# EAGLE board MicroMod_Asset_Tracker-Panel (EAGLE 9.6.2), part 1 of 5
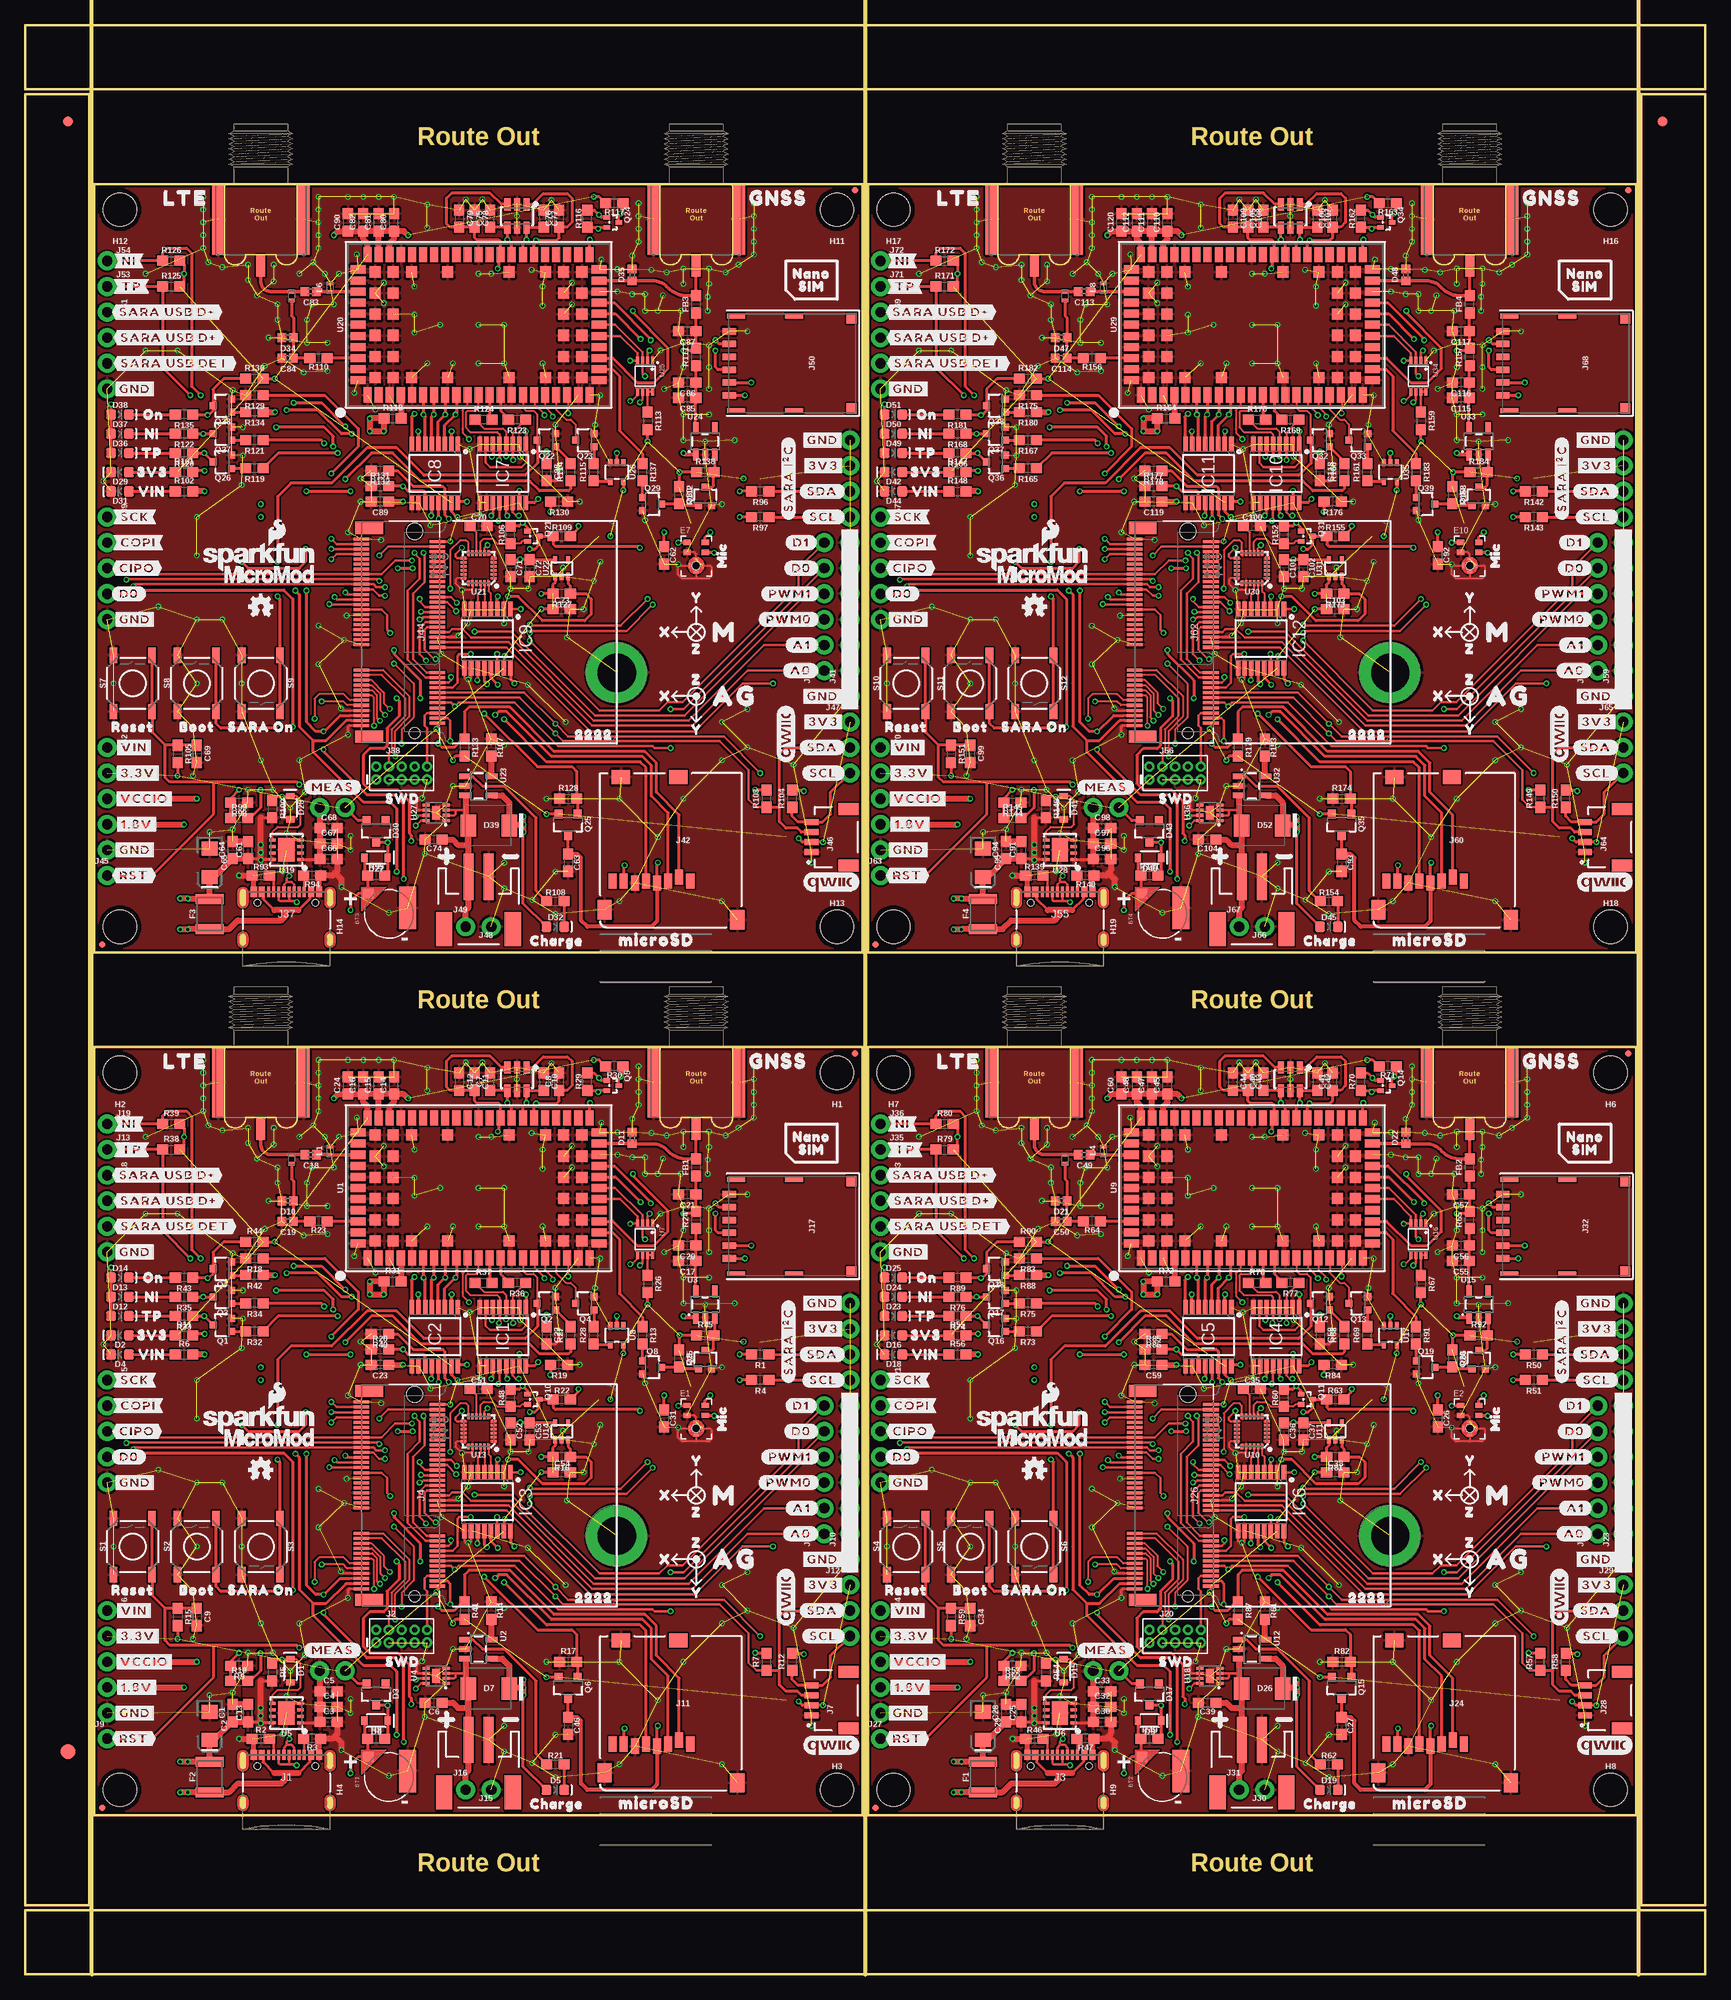
[diagram p0: board, top side]
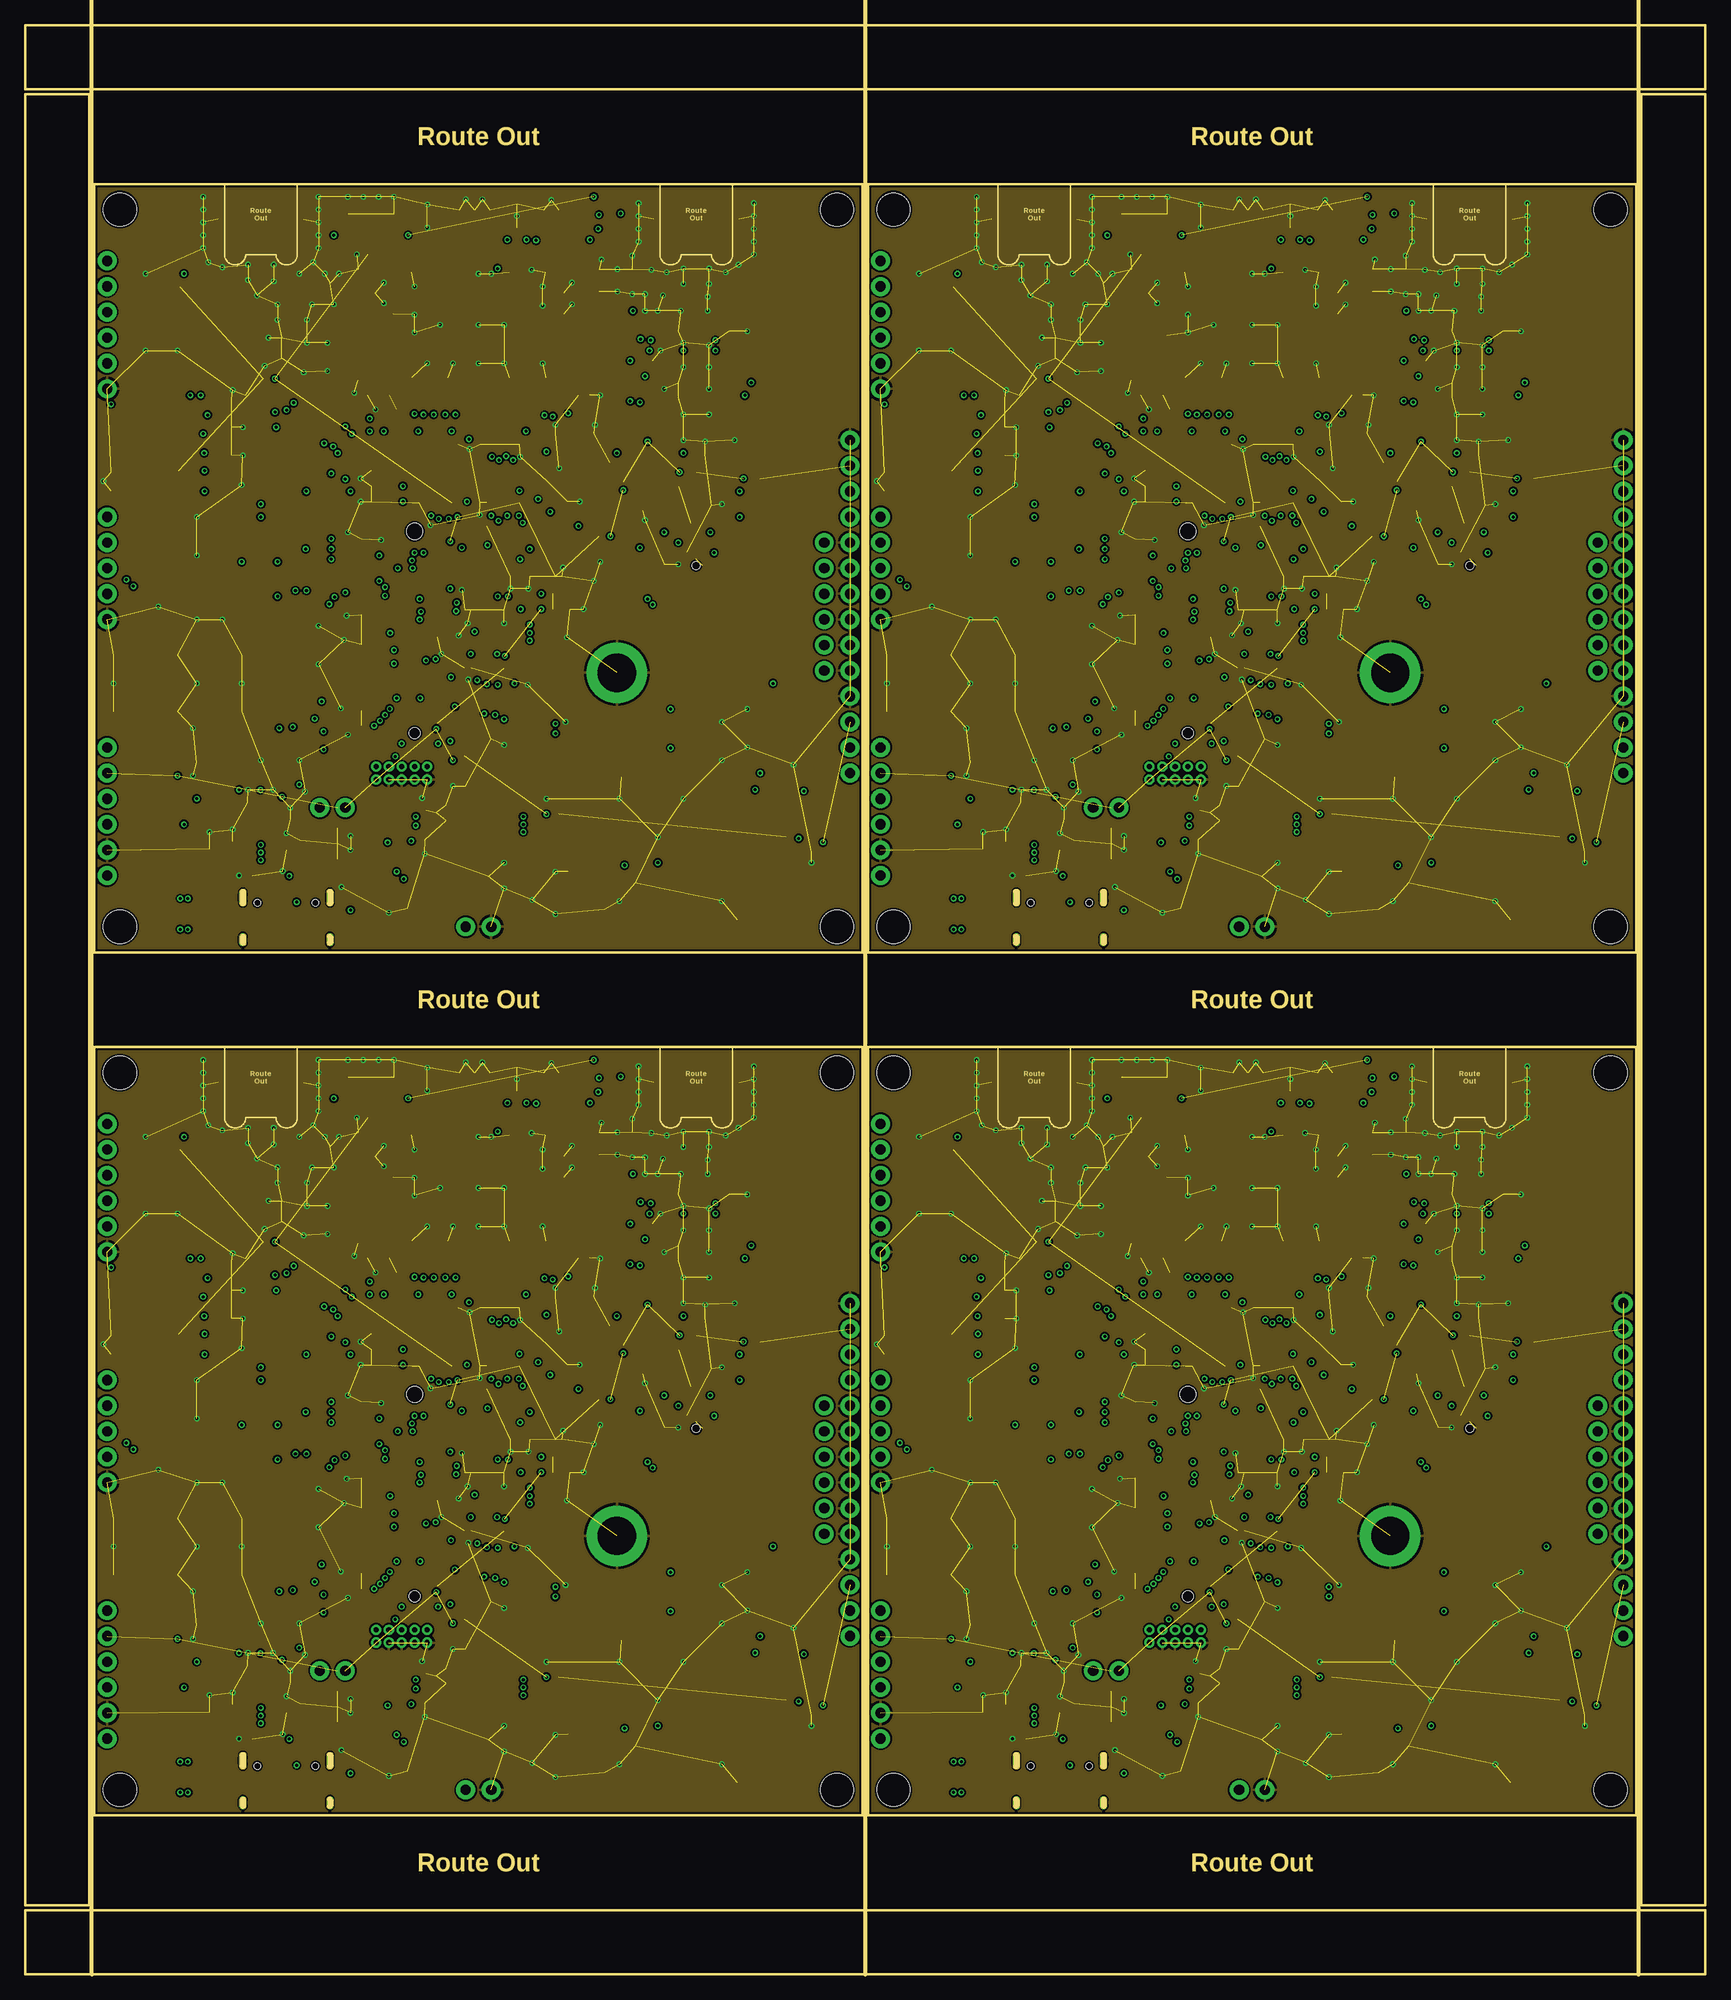
[diagram p1: board, inner layer Route2]
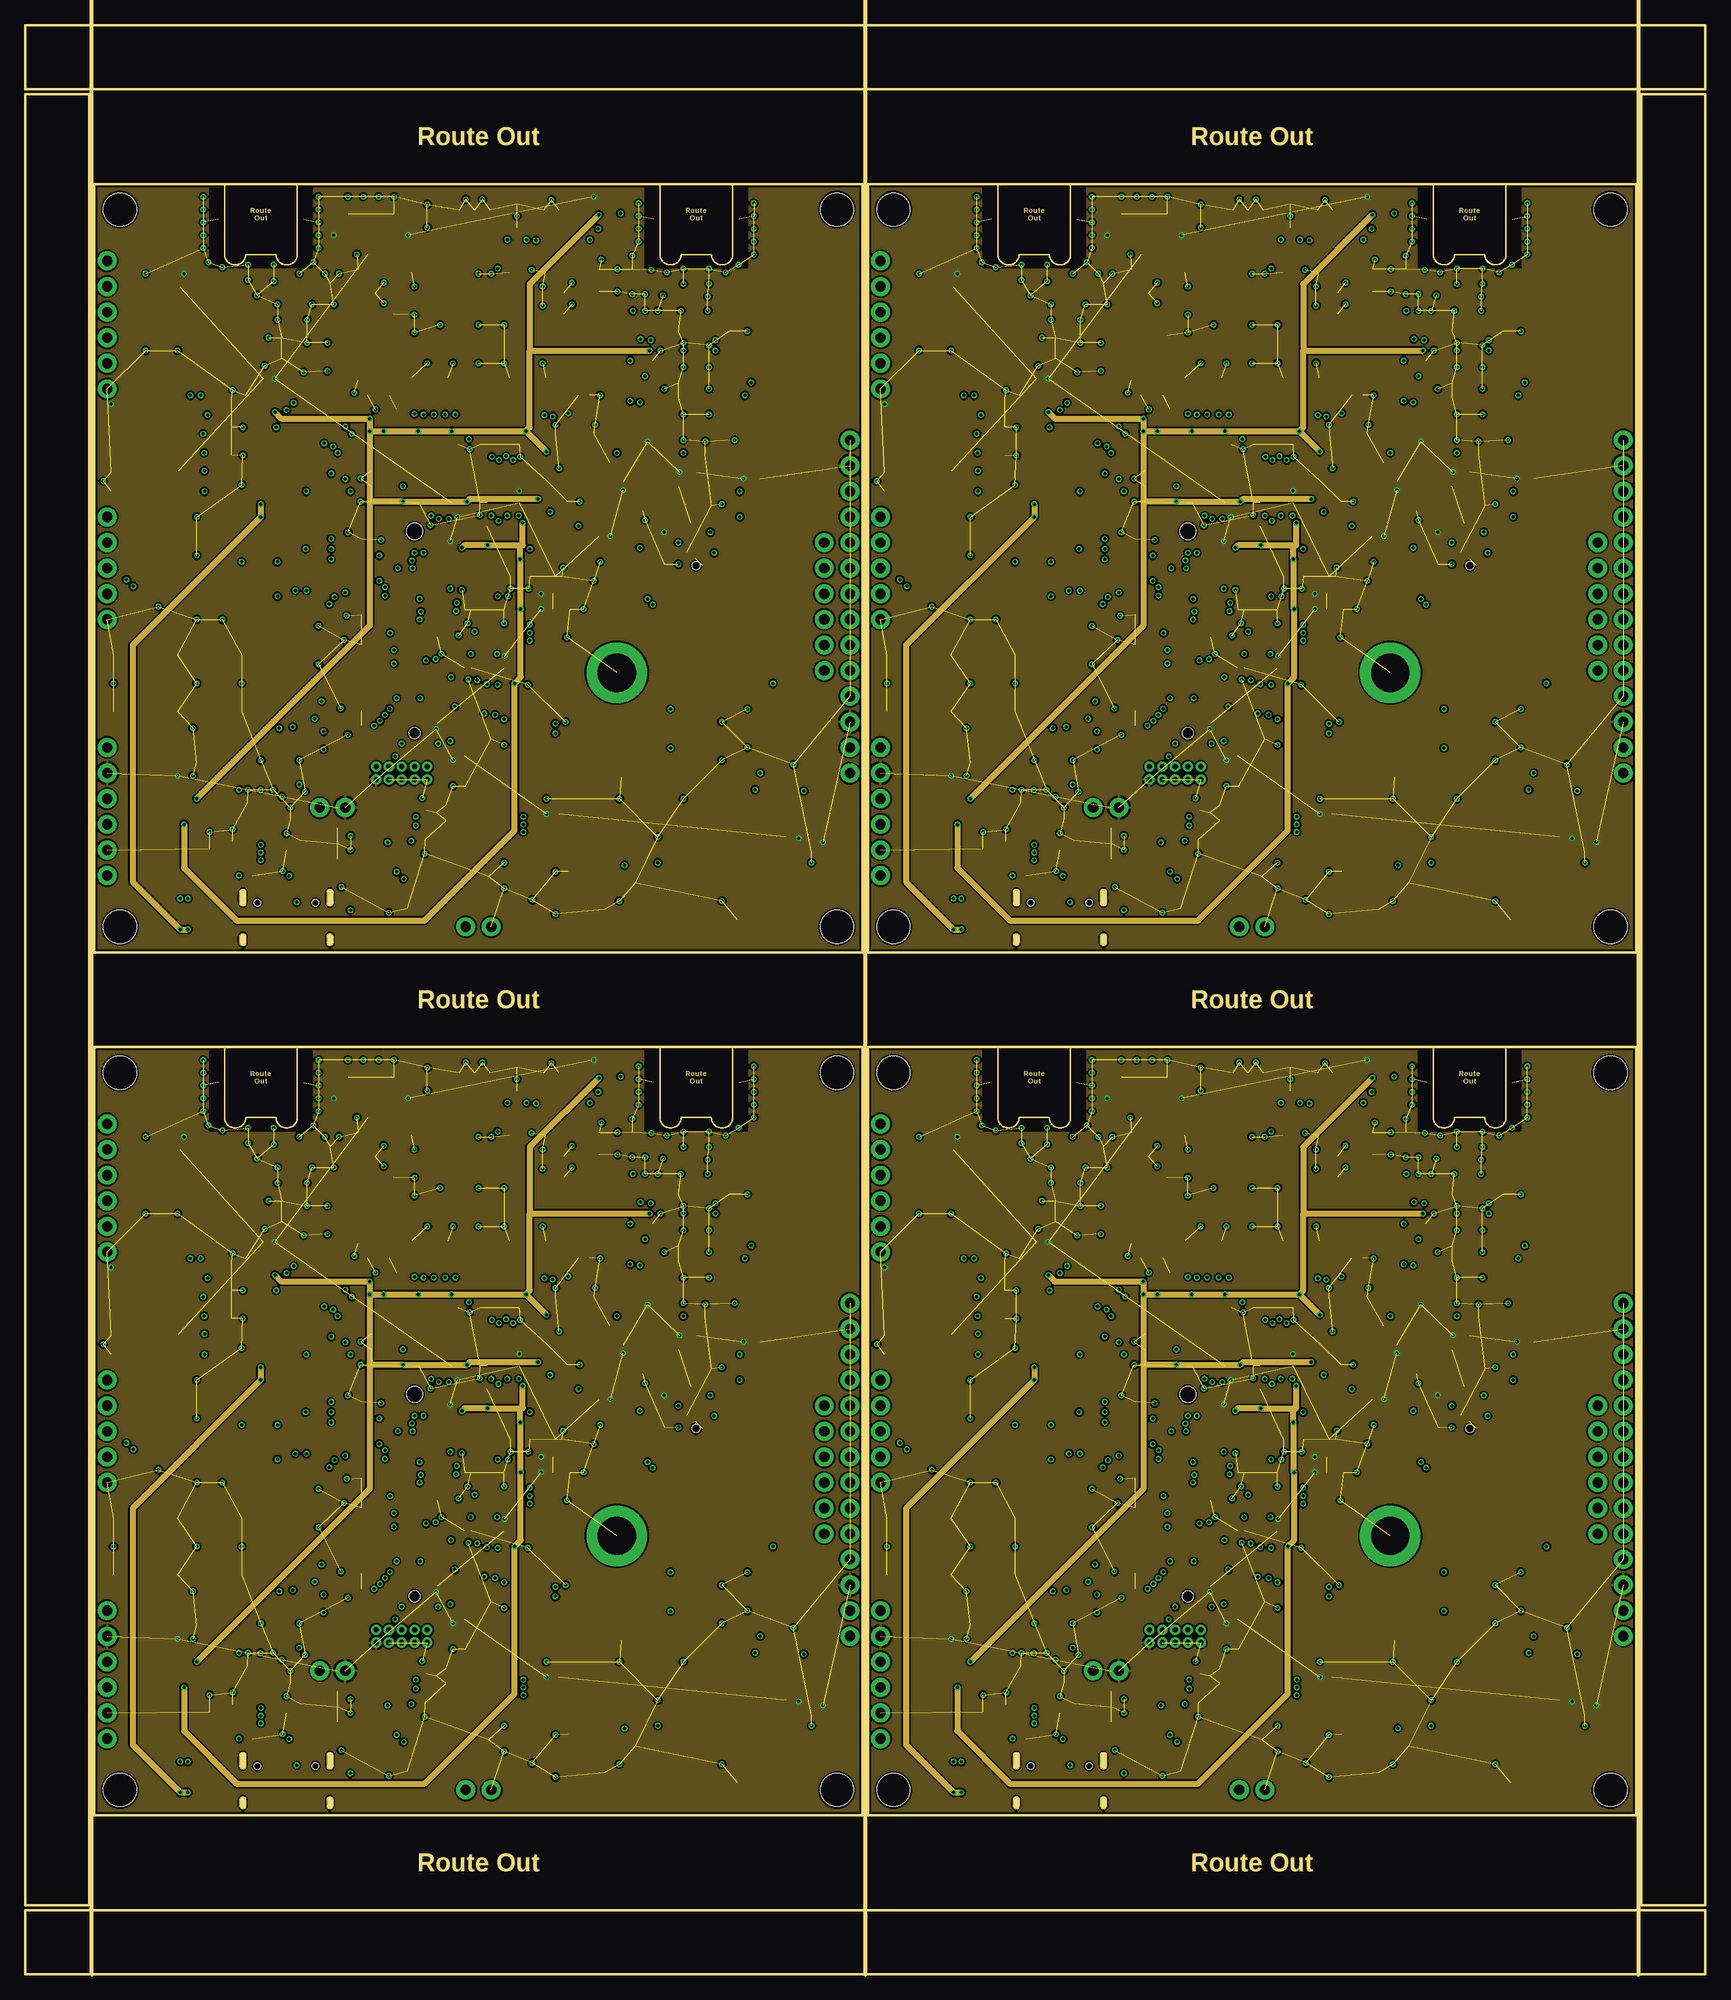
[diagram p2: board, inner layer Route15]
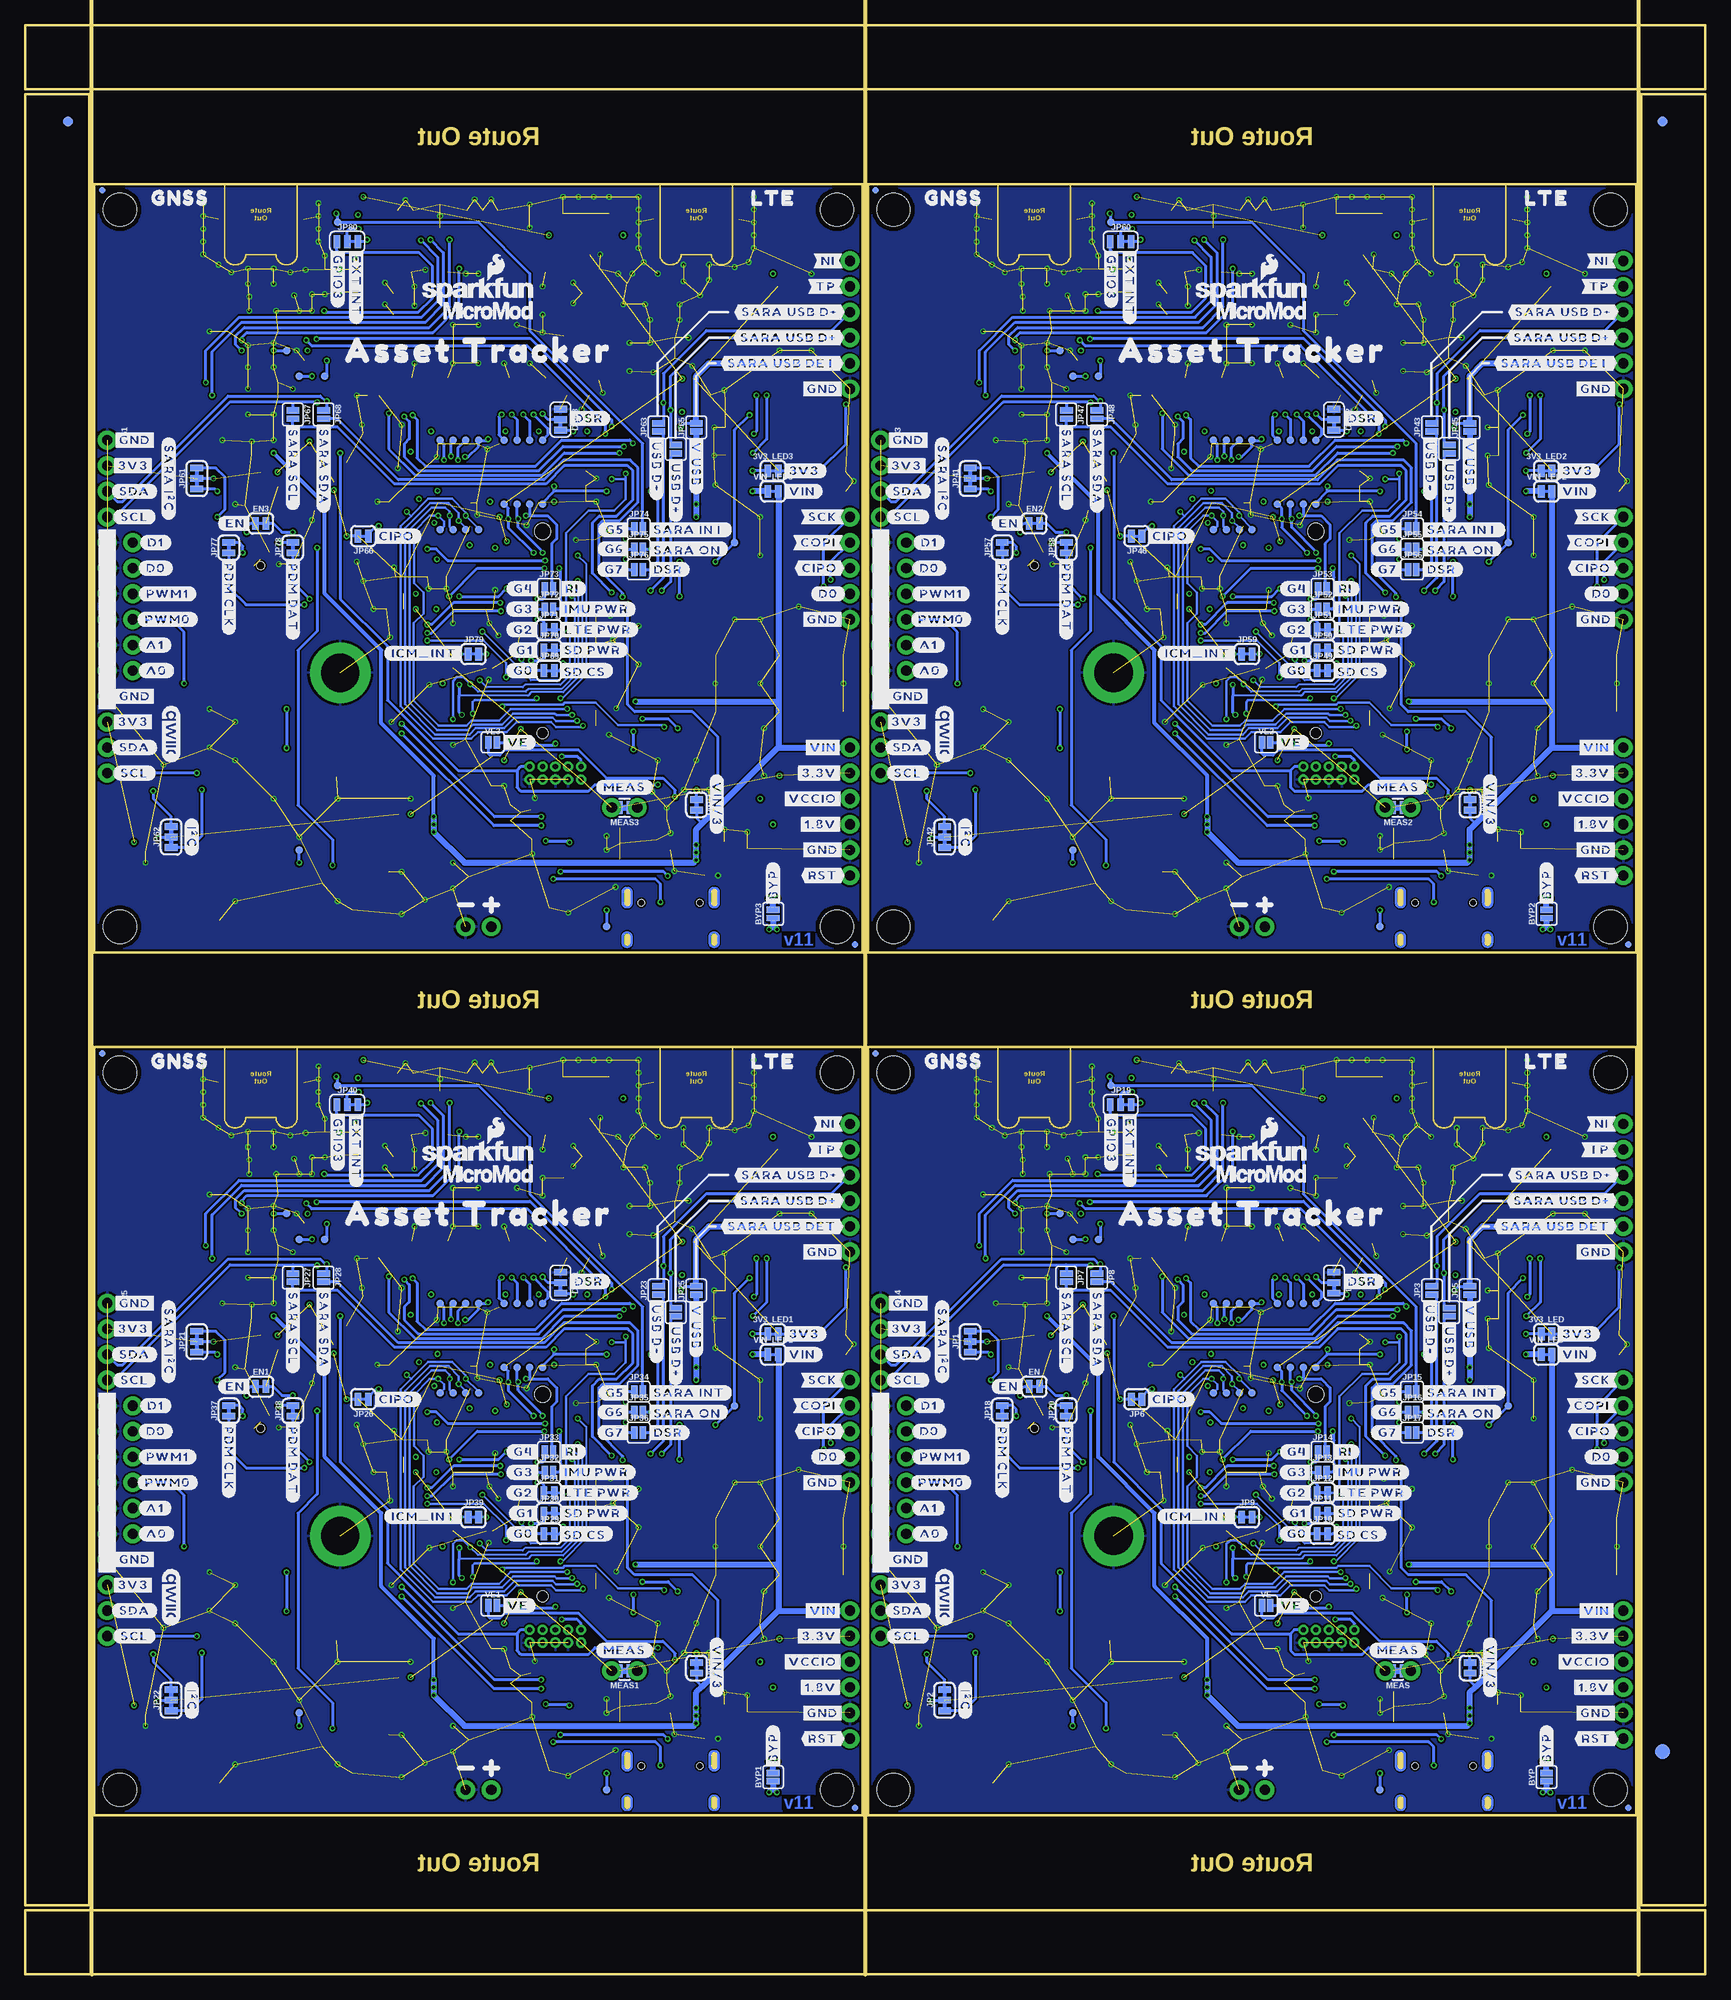
[diagram p3: board, bottom side, seen from below]

Size 166.62 x 193.29 mm. Coordinates in mm from the lower left corner, seen from the top.
Outline: 6.86,15.75 6.86,91.95 83.06,91.95 83.06,15.75 6.86,15.75
Outline: 83.57,15.75 83.57,91.95 159.77,91.95 159.77,15.75 83.57,15.75
Outline: 6.86,101.35 6.86,177.55 83.06,177.55 83.06,101.35 6.86,101.35
Outline: 83.57,101.35 83.57,177.55 159.77,177.55 159.77,101.35 83.57,101.35
Outline: 0,6.35 166.62,6.35 166.62,0 0,0 0,6.35
Outline: 160.27,186.44 166.62,186.44 166.62,6.86 160.27,6.86 160.27,186.44
Outline: 0,193.29 166.62,193.29 166.62,186.94 0,186.94 0,193.29
Outline: 0,186.44 6.35,186.44 6.35,6.86 0,6.86 0,186.44
Copper layers (1+2*15+16): Top 0.035mm / dielectric 0.2mm / Route2 0.0175mm / dielectric 1.065mm / Route15 0.0175mm / dielectric 0.2mm / Bottom 0.035mm
Design rules "MicroMod_Asset_Tracker": minimum track width 5mil, minimum drill 0.2mm, track to track 5mil, track to pad 0.2mm, pad to pad 5mil, via to via 0.2mm, smd to smd 0mil, copper to edge 0.2mm, drill to drill 10mil, minimum pad ring 0.13mm, minimum via ring 0.13mm, stop-mask expansion 0.05mm, vias tented up to drill 25mil, thermal gap 10mil
Net classes: 0 default: width 0 mm, drill 0 mm
Milling: 3 lines

## Footprints (pad centres in the part's own frame; a part is rotated, then mirrored left to right if it is on the bottom)
SMT-JUMPER_2_NC_TRACE_SILK = smd 0.66 x 1.27: 1 -0.521,0; 2 0.521,0
ML414H_IV01E = smd 1 x 1: + 2.022,2.032 | smd 4.2 x 1.7: - 0.6,-1.85
SMT-JUMPER_2_NO_SILK = smd 0.635 x 1.27: 1 -0.406,0; 2 0.406,0
0603 = smd 1.1 x 1: 1 -0.85,0; 2 0.85,0
EIA3216 = smd 1.4 x 1.6: + 1.4,0; - -1.4,0
0402 = smd 0.85 x 0.9: 1 -0.58,0; 2 0.58,0
SOD-323 = smd 0.63 x 0.83: A 1.15,0; C -1.15,0
LED-0603 = smd 1 x 1: A -0.877,0; C 0.877,0
SOT23-3 = smd 0.8 x 0.9: 1 -0.95,-1; 2 0.95,-1; 3 0,1.1
DO-214BA = smd 1.52 x 2.21: A -2.032,0; C 2.038,0
SOT23-6L = smd 0.6 x 1.2: 1 -0.95,-1.15; 2 0,-1.15; 3 0.95,-1.15; 4 0.95,1.15; 5 0,1.15; 6 -0.95,1.15
SMT-JUMPER_3_1-NC_TRACE_SILK = smd 0.66 x 1.27: 1 -1.041,0; 2 0,0; 3 1.041,0
SPH0641LM4H-1_MICROPHONE = smd 0.725 x 0.522: 1 -0.9,1.3; 2 -0.9,0.3; 4 0.9,0.3; 5 0.9,1.3 | smd 0.5 x 0.2: 3 0,-1.65; 8 0,-0.35 | smd 0.2 x 0.5: 6 -0.65,-1; 7 0.65,-1 | hole 0.8: 0,-1
SMA-EDGE-SMD = smd 1.15 x 7: GND@0 -4.25,-3.5; GND@1 4.25,-3.5 | smd 0.9 x 2.2: SIG 0,-8.1
FIDUCIAL-1X2 = smd 1 x 1: 1 0,0
FIDUCIAL-1.5X3 = smd 1.5 x 1.5: 1 0,0
1210 = smd 1 x 2.8: 1 -1.5,0; 2 1.5,0
FIDUCIAL-MICRO = smd 0.635 x 0.635: 1 0,0
STAND-OFF = hole 3.302: 0,0
STAND-OFF-REFLOW-M2.5 = drill 3.8 pad 6: 1 0,0
SOP65P640X120-16N = smd 1.5 x 0.45: 1 -2.9,2.275; 2 -2.9,1.625; 3 -2.9,0.975; 4 -2.9,0.325; 5 -2.9,-0.325; 6 -2.9,-0.975; 7 -2.9,-1.625; 8 -2.9,-2.275; 9 2.9,-2.275; 10 2.9,-1.625; 11 2.9,-0.975; 12 2.9,-0.325; 13 2.9,0.325; 14 2.9,0.975; 15 2.9,1.625; 16 2.9,2.275
USB-C-16P_4LAYER-PADS = smd 0.3 x 1: A5 -1.25,-0.34; A6 -0.25,-0.34; A7 0.25,-0.34; A8 1.25,-0.34; B5 1.75,-0.34; B6 0.75,-0.34; B7 -0.75,-0.34; B8 -1.75,-0.34 | smd 0.6 x 1: GND -3.225,-0.34; GND2 3.225,-0.34; VBUS1 -2.45,-0.34; VBUS2 2.45,-0.34 | drill 0.4 pad 0.6 long: SHLD1 -4.318,-0.915; SHLD2 4.318,-0.915; SHLD3 -4.318,-5.095; SHLD4 4.318,-5.095 | hole 0.65: -2.89,-1.445; 2.89,-1.445
2X5-PTH-1.27MM = drill 0.508 pad 1: 1 -2.54,-0.635; 2 -2.54,0.635; 3 -1.27,-0.635; 4 -1.27,0.635; 5 0,-0.635; 6 0,0.635; 7 1.27,-0.635; 8 1.27,0.635; 9 2.54,-0.635; 10 2.54,0.635
M.2-CONNECTOR-E = smd 0.3 x 1.55: 1 9.25,-5.275; 2 9,2.275; 3 8.75,-5.275; 4 8.5,2.275; 5 8.25,-5.275; 6 8,2.275; 7 7.75,-5.275; 8 7.5,2.275; 9 7.25,-5.275; 10 7,2.275; 11 6.75,-5.275; 12 6.5,2.275; 13 6.25,-5.275; 14 6,2.275; 15 5.75,-5.275; 16 5.5,2.275; 17 5.25,-5.275; 18 5,2.275; 19 4.75,-5.275; 20 4.5,2.275; 21 4.25,-5.275; 22 4,2.275; 23 3.75,-5.275; 32 1.5,2.275; 33 1.25,-5.275; 34 1,2.275; 35 0.75,-5.275; 36 0.5,2.275; 37 0.25,-5.275; 38 0,2.275; 39 -0.25,-5.275; 40 -0.5,2.275; 41 -0.75,-5.275; 42 -1,2.275; 43 -1.25,-5.275; 44 -1.5,2.275; 45 -1.75,-5.275; 46 -2,2.275; 47 -2.25,-5.275; 48 -2.5,2.275; 49 -2.75,-5.275; 50 -3,2.275; 51 -3.25,-5.275; 52 -3.5,2.275; 53 -3.75,-5.275; 54 -4,2.275; 55 -4.25,-5.275; 56 -4.5,2.275; 57 -4.75,-5.275; 58 -5,2.275; 59 -5.25,-5.275; 60 -5.5,2.275; 61 -5.75,-5.275; 62 -6,2.275; 63 -6.25,-5.275; 64 -6.5,2.275; 65 -6.75,-5.275; 66 -7,2.275; 67 -7.25,-5.275; 68 -7.5,2.275; 69 -7.75,-5.275; 70 -8,2.275; 71 -8.25,-5.275; 72 -8.5,2.275; 73 -8.75,-5.275; 74 -9,2.275; 75 -9.25,-5.275 | smd 1.2 x 2.75: A1 10.35,-4.5; A2 -10.35,-4.5 | hole 1.1: 10,0 | hole 1.6: -10,0
1X05_NO_SILK = drill 1.016 pad 1.88: 1 0,0; 2 2.54,0; 3 5.08,0; 4 7.62,0; 5 10.16,0
JST04_1MM_RA = smd 0.6 x 1.35: 1 -1.5,0; 2 -0.5,0; 3 0.5,0; 4 1.5,0 | smd 1.2 x 2: NC1 2.8,-3.675; NC2 -2.8,-3.675
1X06_NO_SILK = drill 1.016 pad 1.88: 1 0,0; 2 2.54,0; 3 5.08,0; 4 7.62,0; 5 10.16,0; 6 12.7,0
1X01_NO_SILK = drill 1.016 pad 1.88: 1 0,0
MICRO-SD-SOCKET = smd 1.8 x 1.4: CD1 -2.05,0.4; CD2 -7.75,0.4 | smd 0.8 x 1.5: CS/DAT3 -7.84,10.3; DAT1 -1.24,10.7; DAT2 -8.94,10.7; DI/CMD -6.74,10.7; DO/DAT0 -2.34,10.7; GND -3.44,10.9; SCLK -4.54,10.7; VCC -5.64,10.9 | smd 1.4 x 1.9: GND1 -13.6,14.55; GND3 -0.45,13.55
1X04_NO_SILK = drill 1.016 pad 1.88: 1 0,0; 2 2.54,0; 3 5.08,0; 4 7.62,0
JST-2-SMD = smd 1 x 4.6: 1 -1,-3.7; 2 1,-3.7 | smd 1.6 x 3.4: NC1 -3.4,1.5; NC2 3.4,1.5
1X02_NO_SILK = drill 1.016 pad 1.88: 1 0,0; 2 2.54,0
NANO_SIM_WURTH_693043020611 = smd 0.65 x 1.3: C1 1.905,6.25; C2 -0.635,6.25; C3 -1.905,6.25; C5 3.175,6.25; C6 0.635,6.25; C7 -3.175,6.25 | smd 0.48 x 1.8: MNT1 -4.69,5.58; MNT2 4.66,5.58; MNT3 -4.69,-0.17; MNT4 4.66,-0.17 | smd 1.03 x 1: MNT5 -4.465,-5.89; MNT6 4.465,-5.89
SMT-JUMPER_3_2-NC_TRACE_SILK = smd 0.66 x 1.27: 1 -1.041,0; 2 0,0; 3 1.041,0
0402_COILCRAFT = smd 0.356 x 0.66: P$1 -0.432,0; P$2 0.432,0
COMBO-JUMPER_2_NC_TRACE = smd 0.635 x 1.27: 1 -0.508,0; 2 0.508,0 | drill 1.016 pad 1.88: 3 -1.27,0; 4 1.27,0
SOT323 = smd 0.7 x 0.7: 1 -0.65,-0.925; 2 0.65,-0.925; 3 0,0.925
SOT-416FL = smd 0.46 x 0.65: 1 -0.5,-1.1; 2 0.5,-1.1; 3 0,0.05
TACTILE_SWITCH_SMD_5.2MM = smd 1.524 x 0.762: 1 -2.794,1.905; 2 2.794,1.905; 3 -2.794,-1.905; 4 2.794,-1.905
PAD.03X.03 = smd 0.762 x 0.762: P$1 0,0
SARA-LGA = smd 0.8 x 1.5: 1 -11,-6.95; 2 -9.9,-6.95; 3 -8.8,-6.95; 4 -7.7,-6.95; 5 -6.6,-6.95; 6 -5.5,-6.95; 7 -4.4,-6.95; 8 -3.3,-6.95; 9 -2.2,-6.95; 10 -1.1,-6.95; 11 0,-6.95; 12 1.1,-6.95; 13 2.2,-6.95; 14 3.3,-6.95; 15 4.4,-6.95; 16 5.5,-6.95; 17 6.6,-6.95; 18 7.7,-6.95; 19 8.8,-6.95; 20 9.9,-6.95; 21 11,-6.95; 33 11,6.95; 34 9.9,6.95; 35 8.8,6.95; 36 7.7,6.95; 37 6.6,6.95; 38 5.5,6.95; 39 4.4,6.95; 40 3.3,6.95; 41 2.2,6.95; 42 1.1,6.95; 43 0,6.95; 44 -1.1,6.95; 45 -2.2,6.95; 46 -3.3,6.95; 47 -4.4,6.95; 48 -5.5,6.95; 49 -6.6,6.95; 50 -7.7,6.95; 51 -8.8,6.95; 52 -9.9,6.95; 53 -11,6.95 | smd 1.5 x 0.8: 22 11.95,-5.5; 23 11.95,-4.4; 24 11.95,-3.3; 25 11.95,-2.2; 26 11.95,-1.1; 27 11.95,0; 28 11.95,1.1; 29 11.95,2.2; 30 11.95,3.3; 31 11.95,4.4; 32 11.95,5.5; 54 -11.95,5.5; 55 -11.95,4.4; 56 -11.95,3.3; 57 -11.95,2.2; 58 -11.95,1.1; 59 -11.95,0; 60 -11.95,-1.1; 61 -11.95,-2.2; 62 -11.95,-3.3; 63 -11.95,-4.4; 64 -11.95,-5.5 | smd 1.1 x 1.1: 65 -10.25,-5.25; 66 -10.25,-3.15; 67 -10.25,-1.05; 68 -10.25,1.05; 69 -10.25,3.15; 70 -10.25,5.25; 71 -8.45,-5.25; 72 -8.45,-3.15; 73 -8.45,-1.05; 74 -8.45,1.05; 75 -8.45,3.15; 76 -8.45,5.25; 77 -6.65,-5.25; 78 -6.65,5.25; 79 -3.05,-5.25; 80 -3.05,5.25; 81 3.05,-5.25; 82 3.05,5.25; 83 6.65,-5.25; 84 6.65,5.25; 85 8.45,-5.25; 86 8.45,-3.15; 87 8.45,-1.05; 88 8.45,1.05; 89 8.45,3.15; 90 8.45,5.25; 91 10.25,-5.25; 92 10.25,-3.15; 93 10.25,-1.05; 94 10.25,1.05; 95 10.25,3.15; 96 10.25,5.25
SOT23-5 = smd 0.55 x 1.2: 1 -0.95,-1.3; 2 0,-1.3; 3 0.95,-1.3; 4 0.95,1.3; 5 -0.95,1.3
DFN-8 = smd 0.3 x 0.7: 1 -0.75,-0.99; 2 -0.25,-0.99; 3 0.25,-0.99; 4 0.75,-0.99; 5 0.75,0.99; 6 0.25,0.99; 7 -0.25,0.99; 8 -0.75,0.99 | smd 1.38 x 0.8: 9 0,0
UDFN-8 = smd 0.3 x 0.65: 1 -0.975,-1.375; 2 -0.325,-1.375; 3 0.325,-1.375; 4 0.975,-1.375; 5 0.975,1.375; 6 0.325,1.375; 7 -0.325,1.375; 8 -0.975,1.375 | smd 2.35 x 1.6: EP 0,0
VSSOP_8PIN = smd 0.8 x 0.3: P1 -1.55,0.75; P2 -1.55,0.25; P3 -1.55,-0.25; P4 -1.55,-0.75; P5 1.55,-0.75; P6 1.55,-0.25; P7 1.55,0.25; P8 1.55,0.75
SOT353 = smd 0.42 x 0.7: 1 -0.65,-0.95; 2 0,-0.95; 3 0.65,-0.95; 4 0.65,0.95; 5 -0.65,0.95
QFN24-3X3-ICM-20948 = smd 0.495 x 0.25: 1 -1.552,1; 6 -1.552,-1; 13 1.552,-1; 18 1.552,1 | smd 0.6 x 0.25: 2 -1.5,0.6; 3 -1.5,0.2; 4 -1.5,-0.2; 5 -1.5,-0.6; 14 1.5,-0.6; 15 1.5,-0.2; 16 1.5,0.2; 17 1.5,0.6 | smd 0.25 x 0.495: 7 -1,-1.552; 12 1,-1.552; 19 1,1.552; 24 -1,1.552 | smd 0.25 x 0.6: 8 -0.6,-1.5; 9 -0.2,-1.5; 10 0.2,-1.5; 11 0.6,-1.5; 20 0.6,1.5; 21 0.2,1.5; 22 -0.2,1.5; 23 -0.6,1.5
SC70 = smd 0.4 x 0.75: 1 -0.65,-0.825; 2 0,-0.825; 3 0.65,-0.825; 4 0.65,0.825; 5 -0.65,0.825

## Placement (x,y rotation side)
3V3_LED  [SMT-JUMPER_2_NC_TRACE_SILK]  15.75,63.5 0 bottom
3V3_LED1  [SMT-JUMPER_2_NC_TRACE_SILK]  92.46,63.5 0 bottom
3V3_LED2  [SMT-JUMPER_2_NC_TRACE_SILK]  15.75,149.1 0 bottom
3V3_LED3  [SMT-JUMPER_2_NC_TRACE_SILK]  92.46,149.1 0 bottom
BT1  ML414H  [ML414H_IV01E]  36.07,19.56 90 top
BT2  ML414H  [ML414H_IV01E]  112.78,19.56 90 top
BT3  ML414H  [ML414H_IV01E]  36.07,105.16 90 top
BT4  ML414H  [ML414H_IV01E]  112.78,105.16 90 top
BYP  JUMPER-SMT_2_NO_SILK  [SMT-JUMPER_2_NO_SILK]  15.75,19.56 90 bottom
BYP1  JUMPER-SMT_2_NO_SILK  [SMT-JUMPER_2_NO_SILK]  92.46,19.56 90 bottom
BYP2  JUMPER-SMT_2_NO_SILK  [SMT-JUMPER_2_NO_SILK]  15.75,105.16 90 bottom
BYP3  JUMPER-SMT_2_NO_SILK  [SMT-JUMPER_2_NO_SILK]  92.46,105.16 90 bottom
C1  0.1uF  [0603]  20.57,25.91 90 top
C2  10uF  [EIA3216]  18.29,24.64 270 top
C3  4.7uF  [0603]  30.1,25.02 0 top
C4  0.1uF  [0603]  30.1,26.54 0 top
C5  0.22uF  [0603]  30.1,28.07 0 top
C6  4.7uF  [0603]  40.51,26.92 180 top
C7  47pF  [0603]  46.1,88.52 90 top
C8  47pF  [0603]  52.96,88.52 90 top
C9  1nF  [0603]  17.02,35.43 270 top
C10  47pF  [0603]  51.43,88.52 270 top
C11  47pF  [0603]  44.58,88.52 270 top
C12  0.1uF  [0603]  43.05,88.52 270 top
C13  0.22uF  [0603]  22.1,25.91 90 top
C14  0.1uF  [0603]  36.58,88.14 90 top
C15  68pF  [0603]  35.05,88.14 90 top
C16  10uF  [0603]  33.53,88.14 90 top
C17  1.0uF  [0603]  65.66,70.74 180 top
C18  33pF  [0402]  28.32,81.28 180 top
C19  27pF  [0402]  26.04,74.68 180 top
C20  0.1uF  [0603]  65.66,72.26 180 top
C21  47pF  [0603]  65.66,77.34 180 top
C22  0.1uF  [0603]  51.69,63.37 270 top
C23  0.1uF  [0603]  35.18,60.45 180 top
C24  15pF  [0603]  32,88.14 90 top
C25  0.22uF  [0603]  98.81,25.91 90 top
C26  0.1uF  [0603]  140.08,55.12 270 top
C27  0.1uF  [0603]  130.56,24.64 270 top
C28  0.1uF  [0603]  97.28,25.91 90 top
C29  10uF  [EIA3216]  95,24.64 270 top
C30  4.7uF  [0603]  106.81,25.02 0 top
C31  0.1uF  [0603]  63.37,55.12 270 top
C32  0.1uF  [0603]  106.81,26.54 0 top
C33  0.22uF  [0603]  106.81,28.07 0 top
C34  1nF  [0603]  93.73,35.43 270 top
C35  0.1uF  [0603]  121.67,58.04 0 top
C36  0.1uF  [0603]  124.84,53.85 270 top
C37  1.0uF  [0603]  126.75,53.85 270 top
C38  1.0uF  [0603]  129.92,49.78 0 top
C39  4.7uF  [0603]  117.22,26.92 180 top
C40  47pF  [0603]  122.81,88.52 90 top
C41  47pF  [0603]  129.67,88.52 90 top
C42  47pF  [0603]  128.14,88.52 270 top
C43  47pF  [0603]  121.29,88.52 270 top
C44  0.1uF  [0603]  119.76,88.52 270 top
C45  0.1uF  [0603]  113.28,88.14 90 top
C46  0.1uF  [0603]  53.85,24.64 270 top
C47  68pF  [0603]  111.76,88.14 90 top
C48  10uF  [0603]  110.24,88.14 90 top
C49  33pF  [0402]  105.03,81.28 180 top
C50  27pF  [0402]  102.74,74.68 180 top
C51  0.1uF  [0603]  44.96,58.04 0 top
C52  0.1uF  [0603]  48.13,53.85 270 top
C53  1.0uF  [0603]  50.04,53.85 270 top
C54  1.0uF  [0603]  53.21,49.78 0 top
C55  1.0uF  [0603]  142.37,70.74 180 top
C56  0.1uF  [0603]  142.37,72.26 180 top
C57  47pF  [0603]  142.37,77.34 180 top
C58  0.1uF  [0603]  128.4,63.37 270 top
C59  0.1uF  [0603]  111.89,60.45 180 top
C60  15pF  [0603]  108.71,88.14 90 top
C61  0.22uF  [0603]  22.1,111.51 90 top
C62  0.1uF  [0603]  63.37,140.72 270 top
C63  0.1uF  [0603]  53.85,110.24 270 top
C64  0.1uF  [0603]  20.57,111.51 90 top
C65  10uF  [EIA3216]  18.29,110.24 270 top
C66  4.7uF  [0603]  30.1,110.62 0 top
C67  0.1uF  [0603]  30.1,112.14 0 top
C68  0.22uF  [0603]  30.1,113.67 0 top
C69  1nF  [0603]  17.02,121.03 270 top
C70  0.1uF  [0603]  44.96,143.64 0 top
C71  0.1uF  [0603]  48.13,139.45 270 top
C72  1.0uF  [0603]  50.04,139.45 270 top
C73  1.0uF  [0603]  53.21,135.38 0 top
C74  4.7uF  [0603]  40.51,112.52 180 top
C75  47pF  [0603]  46.1,174.12 90 top
C76  47pF  [0603]  52.96,174.12 90 top
C77  47pF  [0603]  51.43,174.12 270 top
C78  47pF  [0603]  44.58,174.12 270 top
C79  0.1uF  [0603]  43.05,174.12 270 top
C80  0.1uF  [0603]  36.58,173.74 90 top
C81  68pF  [0603]  35.05,173.74 90 top
C82  10uF  [0603]  33.53,173.74 90 top
C83  33pF  [0402]  28.32,166.88 180 top
C84  27pF  [0402]  26.04,160.27 180 top
C85  1.0uF  [0603]  65.66,156.34 180 top
C86  0.1uF  [0603]  65.66,157.86 180 top
C87  47pF  [0603]  65.66,162.94 180 top
C88  0.1uF  [0603]  51.69,148.97 270 top
C89  0.1uF  [0603]  35.18,146.05 180 top
C90  15pF  [0603]  32,173.74 90 top
C91  0.22uF  [0603]  98.81,111.51 90 top
C92  0.1uF  [0603]  140.08,140.72 270 top
C93  0.1uF  [0603]  130.56,110.24 270 top
C94  0.1uF  [0603]  97.28,111.51 90 top
C95  10uF  [EIA3216]  95,110.24 270 top
C96  4.7uF  [0603]  106.81,110.62 0 top
C97  0.1uF  [0603]  106.81,112.14 0 top
C98  0.22uF  [0603]  106.81,113.67 0 top
C99  1nF  [0603]  93.73,121.03 270 top
C100  0.1uF  [0603]  121.67,143.64 0 top
C101  0.1uF  [0603]  124.84,139.45 270 top
C102  1.0uF  [0603]  126.75,139.45 270 top
C103  1.0uF  [0603]  129.92,135.38 0 top
C104  4.7uF  [0603]  117.22,112.52 180 top
C105  47pF  [0603]  122.81,174.12 90 top
C106  47pF  [0603]  129.67,174.12 90 top
C107  47pF  [0603]  128.14,174.12 270 top
C108  47pF  [0603]  121.29,174.12 270 top
C109  0.1uF  [0603]  119.76,174.12 270 top
C110  0.1uF  [0603]  113.28,173.74 90 top
C111  68pF  [0603]  111.76,173.74 90 top
C112  10uF  [0603]  110.24,173.74 90 top
C113  33pF  [0402]  105.03,166.88 180 top
C114  27pF  [0402]  102.74,160.27 180 top
C115  1.0uF  [0603]  142.37,156.34 180 top
C116  0.1uF  [0603]  142.37,157.86 180 top
C117  47pF  [0603]  142.37,162.94 180 top
C118  0.1uF  [0603]  128.4,148.97 270 top
C119  0.1uF  [0603]  111.89,146.05 180 top
C120  15pF  [0603]  108.71,173.74 90 top
D1  3.3V  [SOD-323]  26.29,30.1 270 top
D2  RED  [LED-0603]  9.4,63.37 180 top
D3  BAS70-05  [SOT23-3]  34.8,27.81 180 top
D4  Yellow  [LED-0603]  9.4,61.47 180 top
D5  Yellow  [LED-0603]  52.58,18.29 0 top
D6  3A/10V/280mV  [SOD-323]  34.8,25.15 180 top
D7  1A/15V/220mV  [DO-214BA]  45.97,28.32 0 top
D8  DT1042-04SO-7  [SOT23-6L]  48.77,88.77 180 top
D9  3A/10V/280mV  [SOD-323]  111.51,25.15 180 top
D10  PESD0402  [0402]  26.04,76.71 180 top
D11  PESD0402  [0402]  60.2,82.93 90 top
D12  GREEN  [LED-0603]  9.4,65.28 0 top
D13  BLUE  [LED-0603]  9.4,67.18 0 top
D14  WHITE  [LED-0603]  9.4,69.09 0 top
D15  3.3V  [SOD-323]  103,30.1 270 top
D16  RED  [LED-0603]  86.11,63.37 180 top
D17  BAS70-05  [SOT23-3]  111.51,27.81 180 top
D18  Yellow  [LED-0603]  86.11,61.47 180 top
D19  Yellow  [LED-0603]  129.29,18.29 0 top
D20  DT1042-04SO-7  [SOT23-6L]  125.48,88.77 180 top
D21  PESD0402  [0402]  102.74,76.71 180 top
D22  PESD0402  [0402]  136.91,82.93 90 top
D23  GREEN  [LED-0603]  86.11,65.28 0 top
D24  BLUE  [LED-0603]  86.11,67.18 0 top
D25  WHITE  [LED-0603]  86.11,69.09 0 top
D26  1A/15V/220mV  [DO-214BA]  122.68,28.32 0 top
D27  3A/10V/280mV  [SOD-323]  34.8,110.74 180 top
D28  3.3V  [SOD-323]  26.29,115.7 270 top
D29  RED  [LED-0603]  9.4,148.97 180 top
D30  BAS70-05  [SOT23-3]  34.8,113.41 180 top
D31  Yellow  [LED-0603]  9.4,147.07 180 top
D32  Yellow  [LED-0603]  52.58,103.89 0 top
D33  DT1042-04SO-7  [SOT23-6L]  48.77,174.37 180 top
D34  PESD0402  [0402]  26.04,162.31 180 top
D35  PESD0402  [0402]  60.2,168.53 90 top
D36  GREEN  [LED-0603]  9.4,150.88 0 top
D37  BLUE  [LED-0603]  9.4,152.78 0 top
D38  WHITE  [LED-0603]  9.4,154.69 0 top
D39  1A/15V/220mV  [DO-214BA]  45.97,113.92 0 top
D40  3A/10V/280mV  [SOD-323]  111.51,110.74 180 top
D41  3.3V  [SOD-323]  103,115.7 270 top
D42  RED  [LED-0603]  86.11,148.97 180 top
D43  BAS70-05  [SOT23-3]  111.51,113.41 180 top
D44  Yellow  [LED-0603]  86.11,147.07 180 top
D45  Yellow  [LED-0603]  129.29,103.89 0 top
D46  DT1042-04SO-7  [SOT23-6L]  125.48,174.37 180 top
D47  PESD0402  [0402]  102.74,162.31 180 top
D48  PESD0402  [0402]  136.91,168.53 90 top
D49  GREEN  [LED-0603]  86.11,150.88 0 top
D50  BLUE  [LED-0603]  86.11,152.78 0 top
D51  WHITE  [LED-0603]  86.11,154.69 0 top
D52  1A/15V/220mV  [DO-214BA]  122.68,113.92 0 top
DSR  JUMPER-SMT_3_1-NC_TRACE_SILK  [SMT-JUMPER_3_1-NC_TRACE_SILK]  36.83,68.58 270 bottom
DSR1  JUMPER-SMT_3_1-NC_TRACE_SILK  [SMT-JUMPER_3_1-NC_TRACE_SILK]  113.54,68.58 270 bottom
DSR2  JUMPER-SMT_3_1-NC_TRACE_SILK  [SMT-JUMPER_3_1-NC_TRACE_SILK]  36.83,154.18 270 bottom
DSR3  JUMPER-SMT_3_1-NC_TRACE_SILK  [SMT-JUMPER_3_1-NC_TRACE_SILK]  113.54,154.18 270 bottom
E1  SPH0641LM4H-1  [SPH0641LM4H-1_MICROPHONE]  66.55,55.12 0 top
E2  SPH0641LM4H-1  [SPH0641LM4H-1_MICROPHONE]  143.26,55.12 0 top
E3  LTE  [SMA-EDGE-SMD]  23.37,91.95 0 top
E4  GNSS  [SMA-EDGE-SMD]  66.55,91.95 0 top
E5  LTE  [SMA-EDGE-SMD]  100.08,91.95 0 top
E6  GNSS  [SMA-EDGE-SMD]  143.26,91.95 0 top
E7  SPH0641LM4H-1  [SPH0641LM4H-1_MICROPHONE]  66.55,140.72 0 top
E8  LTE  [SMA-EDGE-SMD]  23.37,177.55 0 top
E9  GNSS  [SMA-EDGE-SMD]  66.55,177.55 0 top
E10  SPH0641LM4H-1  [SPH0641LM4H-1_MICROPHONE]  143.26,140.72 0 top
E11  LTE  [SMA-EDGE-SMD]  100.08,177.55 0 top
E12  GNSS  [SMA-EDGE-SMD]  143.26,177.55 0 top
E$1  [FIDUCIAL-1X2]  4.23,183.77 0 top
E$2  [FIDUCIAL-1X2]  4.23,183.77 0 bottom
E$3  [FIDUCIAL-1X2]  162.39,183.77 0 top
E$4  [FIDUCIAL-1X2]  162.39,183.77 0 bottom
E$5  [FIDUCIAL-1.5X3]  4.23,22.1 0 top
E$6  [FIDUCIAL-1.5X3]  4.23,22.1 0 bottom
EN  [SMT-JUMPER_2_NC_TRACE_SILK]  66.55,58.29 0 bottom
EN1  [SMT-JUMPER_2_NC_TRACE_SILK]  143.26,58.29 0 bottom
EN2  [SMT-JUMPER_2_NC_TRACE_SILK]  66.55,143.89 0 bottom
EN3  [SMT-JUMPER_2_NC_TRACE_SILK]  143.26,143.89 0 bottom
F1  6V/2A  [1210]  95,19.56 90 top
F2  6V/2A  [1210]  18.29,19.56 90 top
F3  6V/2A  [1210]  18.29,105.16 90 top
F4  6V/2A  [1210]  95,105.16 90 top
FB1  30Ω/1.8A  [0603]  66.55,80.01 90 top
FB2  30Ω/1.8A  [0603]  143.26,80.01 90 top
FB3  30Ω/1.8A  [0603]  66.55,165.61 90 top
FB4  30Ω/1.8A  [0603]  143.26,165.61 90 top
FD1  FIDUCIALUFIDUCIAL  [FIDUCIAL-MICRO]  7.62,16.51 0 top
FD2  FIDUCIALUFIDUCIAL  [FIDUCIAL-MICRO]  82.3,91.31 0 top
FD3  FIDUCIALUFIDUCIAL  [FIDUCIAL-MICRO]  7.62,16.51 0 bottom
FD4  FIDUCIALUFIDUCIAL  [FIDUCIAL-MICRO]  82.3,91.31 0 bottom
FD5  FIDUCIALUFIDUCIAL  [FIDUCIAL-MICRO]  84.33,16.51 0 top
FD6  FIDUCIALUFIDUCIAL  [FIDUCIAL-MICRO]  159,91.31 0 top
FD7  FIDUCIALUFIDUCIAL  [FIDUCIAL-MICRO]  84.33,16.51 0 bottom
FD8  FIDUCIALUFIDUCIAL  [FIDUCIAL-MICRO]  159,91.31 0 bottom
FD9  FIDUCIALUFIDUCIAL  [FIDUCIAL-MICRO]  7.62,102.11 0 top
FD10  FIDUCIALUFIDUCIAL  [FIDUCIAL-MICRO]  82.3,176.91 0 top
FD11  FIDUCIALUFIDUCIAL  [FIDUCIAL-MICRO]  7.62,102.11 0 bottom
FD12  FIDUCIALUFIDUCIAL  [FIDUCIAL-MICRO]  82.3,176.91 0 bottom
FD13  FIDUCIALUFIDUCIAL  [FIDUCIAL-MICRO]  84.33,102.11 0 top
FD14  FIDUCIALUFIDUCIAL  [FIDUCIAL-MICRO]  159,176.91 0 top
FD15  FIDUCIALUFIDUCIAL  [FIDUCIAL-MICRO]  84.33,102.11 0 bottom
FD16  FIDUCIALUFIDUCIAL  [FIDUCIAL-MICRO]  159,176.91 0 bottom
H1  STAND-OFF  [STAND-OFF]  80.52,89.41 0 top
H2  STAND-OFF  [STAND-OFF]  9.4,89.41 0 top
H3  STAND-OFF  [STAND-OFF]  80.52,18.29 0 top
H4  STAND-OFF  [STAND-OFF]  9.4,18.29 0 top
H5  STAND-OFF-REFLOW2.5MM_TALL  [STAND-OFF-REFLOW-M2.5]  58.68,43.48 0 top
H6  STAND-OFF  [STAND-OFF]  157.23,89.41 0 top
H7  STAND-OFF  [STAND-OFF]  86.11,89.41 0 top
H8  STAND-OFF  [STAND-OFF]  157.23,18.29 0 top
H9  STAND-OFF  [STAND-OFF]  86.11,18.29 0 top
H10  STAND-OFF-REFLOW2.5MM_TALL  [STAND-OFF-REFLOW-M2.5]  135.39,43.48 0 top
H11  STAND-OFF  [STAND-OFF]  80.52,175.01 0 top
H12  STAND-OFF  [STAND-OFF]  9.4,175.01 0 top
H13  STAND-OFF  [STAND-OFF]  80.52,103.89 0 top
H14  STAND-OFF  [STAND-OFF]  9.4,103.89 0 top
H15  STAND-OFF-REFLOW2.5MM_TALL  [STAND-OFF-REFLOW-M2.5]  58.68,129.08 0 top
H16  STAND-OFF  [STAND-OFF]  157.23,175.01 0 top
H17  STAND-OFF  [STAND-OFF]  86.11,175.01 0 top
H18  STAND-OFF  [STAND-OFF]  157.23,103.89 0 top
H19  STAND-OFF  [STAND-OFF]  86.11,103.89 0 top
H20  STAND-OFF-REFLOW2.5MM_TALL  [STAND-OFF-REFLOW-M2.5]  135.39,129.08 0 top
IC1  SN74AVC4T774PW  [SOP65P640X120-16N]  47.37,63.25 270 top
IC2  SN74AVC4T774PW  [SOP65P640X120-16N]  40.64,63.25 270 top
IC3  SN74AVC4T774PW  [SOP65P640X120-16N]  45.85,46.86 270 top
IC4  SN74AVC4T774PW  [SOP65P640X120-16N]  124.08,63.25 270 top
IC5  SN74AVC4T774PW  [SOP65P640X120-16N]  117.35,63.25 270 top
IC6  SN74AVC4T774PW  [SOP65P640X120-16N]  122.56,46.86 270 top
IC7  SN74AVC4T774PW  [SOP65P640X120-16N]  47.37,148.84 270 top
IC8  SN74AVC4T774PW  [SOP65P640X120-16N]  40.64,148.84 270 top
IC9  SN74AVC4T774PW  [SOP65P640X120-16N]  45.85,132.46 270 top
IC10  SN74AVC4T774PW  [SOP65P640X120-16N]  124.08,148.84 270 top
IC11  SN74AVC4T774PW  [SOP65P640X120-16N]  117.35,148.84 270 top
IC12  SN74AVC4T774PW  [SOP65P640X120-16N]  122.56,132.46 270 top
J1  [USB-C-16P_4LAYER-PADS]  25.91,22.1 0 top
J2  JTAG  [2X5-PTH-1.27MM]  37.34,33.53 0 top
J3  [USB-C-16P_4LAYER-PADS]  102.62,22.1 0 top
J4  MICROMOD-2222-C  [M.2-CONNECTOR-E]  38.61,47.5 270 top
J5  SPI  [1X05_NO_SILK]  8.13,58.93 270 top
J6  DIAG  [1X05_NO_SILK]  8.13,36.07 270 top
J7  QWIIC_RIGHT_ANGLE  [JST04_1MM_RA]  77.98,27.18 90 top
J8  [1X06_NO_SILK]  79.25,43.69 90 top
J9  !RST!  [1X01_NO_SILK]  8.13,23.37 0 top
J10  [1X06_NO_SILK]  81.79,43.69 90 top
J11  microSD  [MICRO-SD-SOCKET]  57.02,33.53 180 top
J12  [1X04_NO_SILK]  81.79,41.15 270 top
J13  TP  [1X01_NO_SILK]  8.13,81.79 0 top
J14  [1X04_NO_SILK]  81.79,66.55 270 bottom
J15  [JST-2-SMD]  44.96,19.56 180 top
J16  [1X02_NO_SILK]  43.69,18.29 0 top
J17  NANO_SIM  [NANO_SIM_WURTH_693043020611]  76.07,74.17 90 top
J18  SARA_USB  [1X04_NO_SILK]  8.13,79.25 270 top
J19  NI  [1X01_NO_SILK]  8.13,84.33 0 top
J20  JTAG  [2X5-PTH-1.27MM]  114.05,33.53 0 top
J21  SPI  [1X05_NO_SILK]  84.84,58.93 270 top
J22  [1X06_NO_SILK]  155.96,43.69 90 top
J23  [1X06_NO_SILK]  158.5,43.69 90 top
J24  microSD  [MICRO-SD-SOCKET]  133.73,33.53 180 top
J25  [1X04_NO_SILK]  158.5,66.55 270 bottom
J26  MICROMOD-2222-C  [M.2-CONNECTOR-E]  115.32,47.5 270 top
J27  !RST!  [1X01_NO_SILK]  84.84,23.37 0 top
J28  QWIIC_RIGHT_ANGLE  [JST04_1MM_RA]  154.69,27.18 90 top
J29  [1X04_NO_SILK]  158.5,41.15 270 top
J30  [JST-2-SMD]  121.67,19.56 180 top
J31  [1X02_NO_SILK]  120.4,18.29 0 top
J32  NANO_SIM  [NANO_SIM_WURTH_693043020611]  152.78,74.17 90 top
J33  SARA_USB  [1X04_NO_SILK]  84.84,79.25 270 top
J34  DIAG  [1X05_NO_SILK]  84.84,36.07 270 top
J35  TP  [1X01_NO_SILK]  84.84,81.79 0 top
J36  NI  [1X01_NO_SILK]  84.84,84.33 0 top
J37  [USB-C-16P_4LAYER-PADS]  25.91,107.7 0 top
J38  JTAG  [2X5-PTH-1.27MM]  37.34,119.13 0 top
J39  SPI  [1X05_NO_SILK]  8.13,144.53 270 top
J40  [1X06_NO_SILK]  79.25,129.29 90 top
J41  [1X06_NO_SILK]  81.79,129.29 90 top
J42  microSD  [MICRO-SD-SOCKET]  57.02,119.13 180 top
J43  [1X04_NO_SILK]  81.79,152.15 270 bottom
J44  MICROMOD-2222-C  [M.2-CONNECTOR-E]  38.61,133.1 270 top
J45  !RST!  [1X01_NO_SILK]  8.13,108.97 0 top
J46  QWIIC_RIGHT_ANGLE  [JST04_1MM_RA]  77.98,112.78 90 top
J47  [1X04_NO_SILK]  81.79,126.75 270 top
J48  [JST-2-SMD]  44.96,105.16 180 top
J49  [1X02_NO_SILK]  43.69,103.89 0 top
J50  NANO_SIM  [NANO_SIM_WURTH_693043020611]  76.07,159.77 90 top
J51  SARA_USB  [1X04_NO_SILK]  8.13,164.85 270 top
J52  DIAG  [1X05_NO_SILK]  8.13,121.67 270 top
J53  TP  [1X01_NO_SILK]  8.13,167.39 0 top
J54  NI  [1X01_NO_SILK]  8.13,169.93 0 top
J55  [USB-C-16P_4LAYER-PADS]  102.62,107.7 0 top
J56  JTAG  [2X5-PTH-1.27MM]  114.05,119.13 0 top
J57  SPI  [1X05_NO_SILK]  84.84,144.53 270 top
J58  [1X06_NO_SILK]  155.96,129.29 90 top
J59  [1X06_NO_SILK]  158.5,129.29 90 top
J60  microSD  [MICRO-SD-SOCKET]  133.73,119.13 180 top
J61  [1X04_NO_SILK]  158.5,152.15 270 bottom
J62  MICROMOD-2222-C  [M.2-CONNECTOR-E]  115.32,133.1 270 top
J63  !RST!  [1X01_NO_SILK]  84.84,108.97 0 top
J64  QWIIC_RIGHT_ANGLE  [JST04_1MM_RA]  154.69,112.78 90 top
J65  [1X04_NO_SILK]  158.5,126.75 270 top
J66  [JST-2-SMD]  121.67,105.16 180 top
J67  [1X02_NO_SILK]  120.4,103.89 0 top
J68  NANO_SIM  [NANO_SIM_WURTH_693043020611]  152.78,159.77 90 top
J69  SARA_USB  [1X04_NO_SILK]  84.84,164.85 270 top
J70  DIAG  [1X05_NO_SILK]  84.84,121.67 270 top
J71  TP  [1X01_NO_SILK]  84.84,167.39 0 top
J72  NI  [1X01_NO_SILK]  84.84,169.93 0 top
JP1  [SMT-JUMPER_3_2-NC_TRACE_SILK]  72.9,62.74 90 bottom
JP2  [SMT-JUMPER_3_2-NC_TRACE_SILK]  75.44,27.18 90 bottom
JP3  JUMPER-SMT_2_NO_SILK  [SMT-JUMPER_2_NO_SILK]  27.11,67.82 90 bottom
JP4  JUMPER-SMT_2_NO_SILK  [SMT-JUMPER_2_NO_SILK]  25.4,65.66 90 bottom
JP5  JUMPER-SMT_2_NO_SILK  [SMT-JUMPER_2_NO_SILK]  23.37,67.82 90 bottom
JP6  JUMPER-SMT_2_NC_TRACE_SILK  [SMT-JUMPER_2_NC_TRACE_SILK]  56.39,57.02 180 bottom
JP7  JUMPER-SMT_2_NO_SILK  [SMT-JUMPER_2_NO_SILK]  63.37,69.09 270 bottom
JP8  JUMPER-SMT_2_NO_SILK  [SMT-JUMPER_2_NO_SILK]  60.32,69.09 270 bottom
JP9  JUMPER-SMT_2_NC_TRACE_SILK  [SMT-JUMPER_2_NC_TRACE_SILK]  45.47,45.34 0 bottom
JP10  JUMPER-SMT_2_NC_TRACE_SILK  [SMT-JUMPER_2_NC_TRACE_SILK]  37.97,43.69 0 bottom
JP11  JUMPER-SMT_2_NC_TRACE_SILK  [SMT-JUMPER_2_NC_TRACE_SILK]  37.97,45.72 0 bottom
JP12  JUMPER-SMT_2_NC_TRACE_SILK  [SMT-JUMPER_2_NC_TRACE_SILK]  37.97,47.75 0 bottom
JP13  JUMPER-SMT_2_NO_SILK  [SMT-JUMPER_2_NO_SILK]  37.97,49.78 0 bottom
JP14  JUMPER-SMT_2_NO_SILK  [SMT-JUMPER_2_NO_SILK]  37.97,51.82 0 bottom
JP15  JUMPER-SMT_2_NO_SILK  [SMT-JUMPER_2_NO_SILK]  29.08,57.78 0 bottom
JP16  JUMPER-SMT_2_NO_SILK  [SMT-JUMPER_2_NO_SILK]  29.08,55.75 0 bottom
JP17  JUMPER-SMT_2_NO_SILK  [SMT-JUMPER_2_NO_SILK]  29.08,53.72 0 bottom
JP18  JUMPER-SMT_2_NC_TRACE_SILK  [SMT-JUMPER_2_NC_TRACE_SILK]  69.72,55.88 90 bottom
JP19  JUMPER-SMT_3_1-NC_TRACE_SILK  [SMT-JUMPER_3_1-NC_TRACE_SILK]  57.98,86.23 0 bottom
JP20  JUMPER-SMT_2_NC_TRACE_SILK  [SMT-JUMPER_2_NC_TRACE_SILK]  63.37,55.88 90 bottom
JP21  [SMT-JUMPER_3_2-NC_TRACE_SILK]  149.61,62.74 90 bottom
JP22  [SMT-JUMPER_3_2-NC_TRACE_SILK]  152.15,27.18 90 bottom
JP23  JUMPER-SMT_2_NO_SILK  [SMT-JUMPER_2_NO_SILK]  103.82,67.82 90 bottom
JP24  JUMPER-SMT_2_NO_SILK  [SMT-JUMPER_2_NO_SILK]  102.11,65.66 90 bottom
JP25  JUMPER-SMT_2_NO_SILK  [SMT-JUMPER_2_NO_SILK]  100.08,67.82 90 bottom
JP26  JUMPER-SMT_2_NC_TRACE_SILK  [SMT-JUMPER_2_NC_TRACE_SILK]  133.1,57.02 180 bottom
JP27  JUMPER-SMT_2_NO_SILK  [SMT-JUMPER_2_NO_SILK]  140.08,69.09 270 bottom
JP28  JUMPER-SMT_2_NO_SILK  [SMT-JUMPER_2_NO_SILK]  137.03,69.09 270 bottom
JP29  JUMPER-SMT_2_NC_TRACE_SILK  [SMT-JUMPER_2_NC_TRACE_SILK]  114.68,43.69 0 bottom
JP30  JUMPER-SMT_2_NC_TRACE_SILK  [SMT-JUMPER_2_NC_TRACE_SILK]  114.68,45.72 0 bottom
JP31  JUMPER-SMT_2_NC_TRACE_SILK  [SMT-JUMPER_2_NC_TRACE_SILK]  114.68,47.75 0 bottom
JP32  JUMPER-SMT_2_NO_SILK  [SMT-JUMPER_2_NO_SILK]  114.68,49.78 0 bottom
JP33  JUMPER-SMT_2_NO_SILK  [SMT-JUMPER_2_NO_SILK]  114.68,51.82 0 bottom
JP34  JUMPER-SMT_2_NO_SILK  [SMT-JUMPER_2_NO_SILK]  105.79,57.78 0 bottom
JP35  JUMPER-SMT_2_NO_SILK  [SMT-JUMPER_2_NO_SILK]  105.79,55.75 0 bottom
JP36  JUMPER-SMT_2_NO_SILK  [SMT-JUMPER_2_NO_SILK]  105.79,53.72 0 bottom
JP37  JUMPER-SMT_2_NC_TRACE_SILK  [SMT-JUMPER_2_NC_TRACE_SILK]  146.43,55.88 90 bottom
JP38  JUMPER-SMT_2_NC_TRACE_SILK  [SMT-JUMPER_2_NC_TRACE_SILK]  140.08,55.88 90 bottom
JP39  JUMPER-SMT_2_NC_TRACE_SILK  [SMT-JUMPER_2_NC_TRACE_SILK]  122.17,45.34 0 bottom
JP40  JUMPER-SMT_3_1-NC_TRACE_SILK  [SMT-JUMPER_3_1-NC_TRACE_SILK]  134.68,86.23 0 bottom
JP41  [SMT-JUMPER_3_2-NC_TRACE_SILK]  72.9,148.34 90 bottom
JP42  [SMT-JUMPER_3_2-NC_TRACE_SILK]  75.44,112.78 90 bottom
JP43  JUMPER-SMT_2_NO_SILK  [SMT-JUMPER_2_NO_SILK]  27.11,153.42 90 bottom
JP44  JUMPER-SMT_2_NO_SILK  [SMT-JUMPER_2_NO_SILK]  25.4,151.26 90 bottom
JP45  JUMPER-SMT_2_NO_SILK  [SMT-JUMPER_2_NO_SILK]  23.37,153.42 90 bottom
JP46  JUMPER-SMT_2_NC_TRACE_SILK  [SMT-JUMPER_2_NC_TRACE_SILK]  56.39,142.62 180 bottom
JP47  JUMPER-SMT_2_NO_SILK  [SMT-JUMPER_2_NO_SILK]  63.37,154.69 270 bottom
JP48  JUMPER-SMT_2_NO_SILK  [SMT-JUMPER_2_NO_SILK]  60.32,154.69 270 bottom
JP49  JUMPER-SMT_2_NC_TRACE_SILK  [SMT-JUMPER_2_NC_TRACE_SILK]  37.97,129.29 0 bottom
JP50  JUMPER-SMT_2_NC_TRACE_SILK  [SMT-JUMPER_2_NC_TRACE_SILK]  37.97,131.32 0 bottom
JP51  JUMPER-SMT_2_NC_TRACE_SILK  [SMT-JUMPER_2_NC_TRACE_SILK]  37.97,133.35 0 bottom
JP52  JUMPER-SMT_2_NO_SILK  [SMT-JUMPER_2_NO_SILK]  37.97,135.38 0 bottom
JP53  JUMPER-SMT_2_NO_SILK  [SMT-JUMPER_2_NO_SILK]  37.97,137.41 0 bottom
JP54  JUMPER-SMT_2_NO_SILK  [SMT-JUMPER_2_NO_SILK]  29.08,143.38 0 bottom
JP55  JUMPER-SMT_2_NO_SILK  [SMT-JUMPER_2_NO_SILK]  29.08,141.35 0 bottom
JP56  JUMPER-SMT_2_NO_SILK  [SMT-JUMPER_2_NO_SILK]  29.08,139.32 0 bottom
JP57  JUMPER-SMT_2_NC_TRACE_SILK  [SMT-JUMPER_2_NC_TRACE_SILK]  69.72,141.48 90 bottom
JP58  JUMPER-SMT_2_NC_TRACE_SILK  [SMT-JUMPER_2_NC_TRACE_SILK]  63.37,141.48 90 bottom
JP59  JUMPER-SMT_2_NC_TRACE_SILK  [SMT-JUMPER_2_NC_TRACE_SILK]  45.47,130.94 0 bottom
JP60  JUMPER-SMT_3_1-NC_TRACE_SILK  [SMT-JUMPER_3_1-NC_TRACE_SILK]  57.98,171.83 0 bottom
JP61  [SMT-JUMPER_3_2-NC_TRACE_SILK]  149.61,148.34 90 bottom
JP62  [SMT-JUMPER_3_2-NC_TRACE_SILK]  152.15,112.78 90 bottom
JP63  JUMPER-SMT_2_NO_SILK  [SMT-JUMPER_2_NO_SILK]  103.82,153.42 90 bottom
JP64  JUMPER-SMT_2_NO_SILK  [SMT-JUMPER_2_NO_SILK]  102.11,151.26 90 bottom
JP65  JUMPER-SMT_2_NO_SILK  [SMT-JUMPER_2_NO_SILK]  100.08,153.42 90 bottom
JP66  JUMPER-SMT_2_NC_TRACE_SILK  [SMT-JUMPER_2_NC_TRACE_SILK]  133.1,142.62 180 bottom
JP67  JUMPER-SMT_2_NO_SILK  [SMT-JUMPER_2_NO_SILK]  140.08,154.69 270 bottom
JP68  JUMPER-SMT_2_NO_SILK  [SMT-JUMPER_2_NO_SILK]  137.03,154.69 270 bottom
JP69  JUMPER-SMT_2_NC_TRACE_SILK  [SMT-JUMPER_2_NC_TRACE_SILK]  114.68,129.29 0 bottom
JP70  JUMPER-SMT_2_NC_TRACE_SILK  [SMT-JUMPER_2_NC_TRACE_SILK]  114.68,131.32 0 bottom
JP71  JUMPER-SMT_2_NC_TRACE_SILK  [SMT-JUMPER_2_NC_TRACE_SILK]  114.68,133.35 0 bottom
JP72  JUMPER-SMT_2_NO_SILK  [SMT-JUMPER_2_NO_SILK]  114.68,135.38 0 bottom
JP73  JUMPER-SMT_2_NO_SILK  [SMT-JUMPER_2_NO_SILK]  114.68,137.41 0 bottom
JP74  JUMPER-SMT_2_NO_SILK  [SMT-JUMPER_2_NO_SILK]  105.79,143.38 0 bottom
JP75  JUMPER-SMT_2_NO_SILK  [SMT-JUMPER_2_NO_SILK]  105.79,141.35 0 bottom
JP76  JUMPER-SMT_2_NO_SILK  [SMT-JUMPER_2_NO_SILK]  105.79,139.32 0 bottom
JP77  JUMPER-SMT_2_NC_TRACE_SILK  [SMT-JUMPER_2_NC_TRACE_SILK]  146.43,141.48 90 bottom
JP78  JUMPER-SMT_2_NC_TRACE_SILK  [SMT-JUMPER_2_NC_TRACE_SILK]  140.08,141.48 90 bottom
JP79  JUMPER-SMT_2_NC_TRACE_SILK  [SMT-JUMPER_2_NC_TRACE_SILK]  122.17,130.94 0 bottom
JP80  JUMPER-SMT_3_1-NC_TRACE_SILK  [SMT-JUMPER_3_1-NC_TRACE_SILK]  134.68,171.83 0 bottom
L1  DNP  [0402_COILCRAFT]  30.23,81.66 90 top
L2  68nH  [0402_COILCRAFT]  26.42,80.84 90 top
L3  68nH  [0402_COILCRAFT]  103.12,80.84 90 top
L4  DNP  [0402_COILCRAFT]  106.93,81.66 90 top
L5  68nH  [0402_COILCRAFT]  26.42,166.43 90 top
L6  DNP  [0402_COILCRAFT]  30.23,167.26 90 top
L7  68nH  [0402_COILCRAFT]  103.12,166.43 90 top
L8  DNP  [0402_COILCRAFT]  106.93,167.26 90 top
LOGO1  SFE_LOGO_NAME_FLAME.1_INCH  [SFE_LOGO_NAME_FLAME_.1]  23.24,54.99 0 top
LOGO2  QWIIC_LOGO_CONNECTOR  [QWIIC_5.5MM]  79.95,22.73 0 top
LOGO3  OSHW-LOGOMINI  [OSHW-LOGO-MINI]  23.37,50.04 0 top
LOGO4  SFE_LOGO_NAME_FLAME.1_INCH  [SFE_LOGO_NAME_FLAME_.1]  44.96,81.28 0 bottom
LOGO5  SFE_LOGO_NAME_FLAME.1_INCH  [SFE_LOGO_NAME_FLAME_.1]  99.95,54.99 0 top
LOGO6  QWIIC_LOGO_CONNECTOR  [QWIIC_5.5MM]  75.44,37.4 90 top
LOGO7  QWIIC_LOGO_CONNECTOR  [QWIIC_5.5MM]  75.44,37.4 270 bottom
LOGO8  QWIIC_LOGO_CONNECTOR  [QWIIC_5.5MM]  156.65,22.73 0 top
LOGO9  OSHW-LOGOMINI  [OSHW-LOGO-MINI]  100.08,50.04 0 top
LOGO10  SFE_LOGO_NAME_FLAME.1_INCH  [SFE_LOGO_NAME_FLAME_.1]  121.67,81.28 0 bottom
LOGO11  QWIIC_LOGO_CONNECTOR  [QWIIC_5.5MM]  152.15,37.4 90 top
LOGO12  QWIIC_LOGO_CONNECTOR  [QWIIC_5.5MM]  152.15,37.4 270 bottom
LOGO13  SFE_LOGO_NAME_FLAME.1_INCH  [SFE_LOGO_NAME_FLAME_.1]  23.24,140.59 0 top
LOGO14  QWIIC_LOGO_CONNECTOR  [QWIIC_5.5MM]  79.95,108.33 0 top
LOGO15  OSHW-LOGOMINI  [OSHW-LOGO-MINI]  23.37,135.64 0 top
LOGO16  SFE_LOGO_NAME_FLAME.1_INCH  [SFE_LOGO_NAME_FLAME_.1]  44.96,166.88 0 bottom
LOGO17  QWIIC_LOGO_CONNECTOR  [QWIIC_5.5MM]  75.44,123 90 top
LOGO18  QWIIC_LOGO_CONNECTOR  [QWIIC_5.5MM]  75.44,123 270 bottom
LOGO19  SFE_LOGO_NAME_FLAME.1_INCH  [SFE_LOGO_NAME_FLAME_.1]  99.95,140.59 0 top
LOGO20  QWIIC_LOGO_CONNECTOR  [QWIIC_5.5MM]  156.65,108.33 0 top
LOGO21  OSHW-LOGOMINI  [OSHW-LOGO-MINI]  100.08,135.64 0 top
LOGO22  SFE_LOGO_NAME_FLAME.1_INCH  [SFE_LOGO_NAME_FLAME_.1]  121.67,166.88 0 bottom
LOGO23  QWIIC_LOGO_CONNECTOR  [QWIIC_5.5MM]  152.15,123 90 top
LOGO24  QWIIC_LOGO_CONNECTOR  [QWIIC_5.5MM]  152.15,123 270 bottom
MEAS  [COMBO-JUMPER_2_NC_TRACE]  30.48,30.1 180 bottom
MEAS1  [COMBO-JUMPER_2_NC_TRACE]  107.19,30.1 180 bottom
MEAS2  [COMBO-JUMPER_2_NC_TRACE]  30.48,115.7 180 bottom
MEAS3  [COMBO-JUMPER_2_NC_TRACE]  107.19,115.7 180 bottom
Q1  310mA/60V/1.6Ω  [SOT323]  19.56,64.39 90 top
Q2  310mA/60V/1.6Ω  [SOT323]  51.69,66.55 90 top
Q3  310mA/60V/1.6Ω  [SOT323]  19.56,67.18 90 top
Q4  310mA/60V/1.6Ω  [SOT323]  55.5,66.55 90 top
Q5  20V/0.2A/8MHz/1.2Ω/1Vth  [SOT-416FL]  58.8,88.14 270 top
Q6  20V/4.2A/52mΩ/1.4W  [SOT23-3]  53.85,28.45 180 top
Q7  310mA/60V/1.6Ω  [SOT323]  19.56,69.98 90 top
Q8  310mA/60V/1.6Ω  [SOT323]  62.17,60.2 270 top
Q9  310mA/60V/1.6Ω  [SOT323]  67.44,60.96 0 top
Q10  20V/0.2A/8MHz/1.2Ω/1Vth  [SOT-416FL]  50.93,57.02 270 top
Q11  20V/0.2A/8MHz/1.2Ω/1Vth  [SOT-416FL]  127.64,57.02 270 top
Q12  310mA/60V/1.6Ω  [SOT323]  128.4,66.55 90 top
Q13  310mA/60V/1.6Ω  [SOT323]  132.21,66.55 90 top
Q14  20V/0.2A/8MHz/1.2Ω/1Vth  [SOT-416FL]  135.51,88.14 270 top
Q15  20V/4.2A/52mΩ/1.4W  [SOT23-3]  130.56,28.45 180 top
Q16  310mA/60V/1.6Ω  [SOT323]  96.27,64.39 90 top
Q17  310mA/60V/1.6Ω  [SOT323]  96.27,67.18 90 top
Q18  310mA/60V/1.6Ω  [SOT323]  96.27,69.98 90 top
Q19  310mA/60V/1.6Ω  [SOT323]  138.87,60.2 270 top
Q20  310mA/60V/1.6Ω  [SOT323]  144.15,60.96 0 top
Q21  20V/0.2A/8MHz/1.2Ω/1Vth  [SOT-416FL]  50.93,142.62 270 top
Q22  310mA/60V/1.6Ω  [SOT323]  51.69,152.15 90 top
Q23  310mA/60V/1.6Ω  [SOT323]  55.5,152.15 90 top
Q24  20V/0.2A/8MHz/1.2Ω/1Vth  [SOT-416FL]  58.8,173.74 270 top
Q25  20V/4.2A/52mΩ/1.4W  [SOT23-3]  53.85,114.05 180 top
Q26  310mA/60V/1.6Ω  [SOT323]  19.56,149.99 90 top
Q27  310mA/60V/1.6Ω  [SOT323]  19.56,152.78 90 top
Q28  310mA/60V/1.6Ω  [SOT323]  19.56,155.57 90 top
Q29  310mA/60V/1.6Ω  [SOT323]  62.17,145.8 270 top
Q30  310mA/60V/1.6Ω  [SOT323]  67.44,146.56 0 top
Q31  20V/0.2A/8MHz/1.2Ω/1Vth  [SOT-416FL]  127.64,142.62 270 top
Q32  310mA/60V/1.6Ω  [SOT323]  128.4,152.15 90 top
Q33  310mA/60V/1.6Ω  [SOT323]  132.21,152.15 90 top
Q34  20V/0.2A/8MHz/1.2Ω/1Vth  [SOT-416FL]  135.51,173.74 270 top
Q35  20V/4.2A/52mΩ/1.4W  [SOT23-3]  130.56,114.05 180 top
Q36  310mA/60V/1.6Ω  [SOT323]  96.27,149.99 90 top
Q37  310mA/60V/1.6Ω  [SOT323]  96.27,152.78 90 top
Q38  310mA/60V/1.6Ω  [SOT323]  96.27,155.57 90 top
Q39  310mA/60V/1.6Ω  [SOT323]  138.87,145.8 270 top
Q40  310mA/60V/1.6Ω  [SOT323]  144.15,146.56 0 top
R1  2.2k  [0603]  72.9,61.47 180 top
R2  5.1k  [0603]  23.37,23.37 0 top
R3  5.1k  [0603]  28.45,23.37 180 top
R4  2.2k  [0603]  72.9,58.93 180 top
R5  100k  [0603]  24.51,29.97 270 top
R6  4.7k  [0603]  15.75,61.47 0 top
R7  2.2k  [0603]  73.53,30.99 90 top
R8  3.3k  [0603]  34.8,23.37 0 top
R9  10k  [0603]  21.21,30.61 180 top
R10  20k  [0603]  21.21,29.08 0 top
R11  1k  [0603]  15.75,63.37 0 top
R12  2.2k  [0603]  76.07,30.99 90 top
R13  1k  [0603]  61.21,63.37 270 top
R14  2.2k  [0603]  46.23,36.07 270 top
R15  100k  [0603]  15.11,35.43 270 top
R16  100k  [0603]  53.21,51.31 180 top
R17  100k  [0603]  53.85,30.99 0 top
R18  100k  [0603]  22.73,70.99 180 top
R19  100k  [0603]  52.96,60.45 180 top
R20  100k  [0603]  35.18,61.98 0 top
R21  1k  [0603]  52.58,20.83 0 top
R22  2.2k  [0603]  53.21,57.02 0 top
R23  10k  [0603]  29.08,74.68 180 top
R24  10  [0603]  66.55,74.8 90 top
R25  100k  [0603]  64.83,61.09 270 top
R26  200k  [0603]  61.72,68.45 270 top
R27  1k  [0603]  54.1,63.37 90 top
R28  1k  [0603]  56.39,63.37 90 top
R29  2.2k  [0603]  55.75,88.52 90 top
R30  2.2k  [0603]  58.42,90.04 180 top
R31  0  [0603]  36.45,68.71 0 top
R32  1k  [0603]  22.73,63.75 180 top
R33  100  [0603]  15.75,65.28 180 top
R34  1k  [0603]  22.73,66.55 180 top
R35  470  [0603]  15.75,67.18 180 top
R36  0  [0603]  48.77,68.58 180 top
R37  0  [0603]  45.47,68.58 0 top
R38  100k  [0603]  14.48,81.79 0 top
R39  100k  [0603]  14.48,84.33 0 top
R40  100k  [0603]  35.18,63.5 180 top
R41  100k  [0603]  43.56,36.07 270 top
R42  1k  [0603]  22.73,69.34 180 top
R43  1k  [0603]  15.75,69.09 180 top
R44  100k  [0603]  22.73,72.64 0 top
R45  100k  [0603]  67.44,63.37 0 top
R46  5.1k  [0603]  100.08,23.37 0 top
R47  5.1k  [0603]  105.16,23.37 180 top
R48  2.2k  [0603]  48.13,57.15 90 top
R49  3.3k  [0603]  111.51,23.37 0 top
R50  2.2k  [0603]  149.61,61.47 180 top
R51  2.2k  [0603]  149.61,58.93 180 top
R52  10k  [0603]  97.92,30.61 180 top
R53  20k  [0603]  97.92,29.08 0 top
R54  100k  [0603]  101.22,29.97 270 top
R55  1k  [0603]  92.46,63.37 0 top
R56  4.7k  [0603]  92.46,61.47 0 top
R57  2.2k  [0603]  150.24,30.99 90 top
R58  2.2k  [0603]  152.78,30.99 90 top
R59  100k  [0603]  91.82,35.43 270 top
R60  2.2k  [0603]  124.84,57.15 90 top
R61  2.2k  [0603]  122.94,36.07 270 top
R62  1k  [0603]  129.29,20.83 0 top
R63  2.2k  [0603]  129.92,57.02 0 top
R64  10k  [0603]  105.79,74.68 180 top
R65  10  [0603]  143.26,74.8 90 top
R66  100k  [0603]  141.54,61.09 270 top
R67  200k  [0603]  138.43,68.45 270 top
R68  1k  [0603]  130.81,63.37 90 top
R69  1k  [0603]  133.1,63.37 90 top
R70  2.2k  [0603]  132.46,88.52 90 top
R71  2.2k  [0603]  135.13,90.04 180 top
R72  0  [0603]  113.16,68.71 0 top
R73  1k  [0603]  99.44,63.75 180 top
R74  100  [0603]  92.46,65.28 180 top
R75  1k  [0603]  99.44,66.55 180 top
R76  470  [0603]  92.46,67.18 180 top
R77  0  [0603]  125.48,68.58 180 top
R78  0  [0603]  122.17,68.58 0 top
R79  100k  [0603]  91.19,81.79 0 top
R80  100k  [0603]  91.19,84.33 0 top
R81  100k  [0603]  129.92,51.31 180 top
R82  100k  [0603]  130.56,30.99 0 top
R83  100k  [0603]  99.44,70.99 180 top
R84  100k  [0603]  129.67,60.45 180 top
R85  100k  [0603]  111.89,61.98 0 top
R86  100k  [0603]  111.89,63.5 180 top
R87  100k  [0603]  120.27,36.07 270 top
R88  1k  [0603]  99.44,69.34 180 top
R89  1k  [0603]  92.46,69.09 180 top
R90  100k  [0603]  99.44,72.64 0 top
R91  1k  [0603]  137.92,63.37 270 top
R92  100k  [0603]  144.15,63.37 0 top
R93  5.1k  [0603]  23.37,108.97 0 top
R94  5.1k  [0603]  28.45,108.97 180 top
R95  3.3k  [0603]  34.8,108.97 0 top
R96  2.2k  [0603]  72.9,147.07 180 top
R97  2.2k  [0603]  72.9,144.53 180 top
R98  10k  [0603]  21.21,116.2 180 top
R99  20k  [0603]  21.21,114.68 0 top
R100  100k  [0603]  24.51,115.57 270 top
R101  1k  [0603]  15.75,148.97 0 top
R102  4.7k  [0603]  15.75,147.07 0 top
R103  2.2k  [0603]  73.53,116.59 90 top
R104  2.2k  [0603]  76.07,116.59 90 top
R105  100k  [0603]  15.11,121.03 270 top
R106  2.2k  [0603]  48.13,142.75 90 top
R107  2.2k  [0603]  46.23,121.67 270 top
R108  1k  [0603]  52.58,106.43 0 top
R109  2.2k  [0603]  53.21,142.62 0 top
R110  10k  [0603]  29.08,160.27 180 top
R111  10  [0603]  66.55,160.4 90 top
R112  100k  [0603]  64.83,146.69 270 top
R113  200k  [0603]  61.72,154.05 270 top
R114  1k  [0603]  54.1,148.97 90 top
R115  1k  [0603]  56.39,148.97 90 top
R116  2.2k  [0603]  55.75,174.12 90 top
R117  2.2k  [0603]  58.42,175.64 180 top
R118  0  [0603]  36.45,154.3 0 top
R119  1k  [0603]  22.73,149.35 180 top
R120  100  [0603]  15.75,150.88 180 top
R121  1k  [0603]  22.73,152.15 180 top
R122  470  [0603]  15.75,152.78 180 top
R123  0  [0603]  48.77,154.18 180 top
R124  0  [0603]  45.47,154.18 0 top
R125  100k  [0603]  14.48,167.39 0 top
R126  100k  [0603]  14.48,169.93 0 top
R127  100k  [0603]  53.21,136.91 180 top
R128  100k  [0603]  53.85,116.59 0 top
R129  100k  [0603]  22.73,156.59 180 top
R130  100k  [0603]  52.96,146.05 180 top
R131  100k  [0603]  35.18,147.57 0 top
R132  100k  [0603]  35.18,149.1 180 top
R133  100k  [0603]  43.56,121.67 270 top
R134  1k  [0603]  22.73,154.94 180 top
R135  1k  [0603]  15.75,154.69 180 top
R136  100k  [0603]  22.73,158.24 0 top
R137  1k  [0603]  61.21,148.97 270 top
R138  100k  [0603]  67.44,148.97 0 top
R139  5.1k  [0603]  100.08,108.97 0 top
R140  5.1k  [0603]  105.16,108.97 180 top
R141  3.3k  [0603]  111.51,108.97 0 top
R142  2.2k  [0603]  149.61,147.07 180 top
R143  2.2k  [0603]  149.61,144.53 180 top
R144  10k  [0603]  97.92,116.2 180 top
R145  20k  [0603]  97.92,114.68 0 top
R146  100k  [0603]  101.22,115.57 270 top
R147  1k  [0603]  92.46,148.97 0 top
R148  4.7k  [0603]  92.46,147.07 0 top
R149  2.2k  [0603]  150.24,116.59 90 top
R150  2.2k  [0603]  152.78,116.59 90 top
R151  100k  [0603]  91.82,121.03 270 top
R152  2.2k  [0603]  124.84,142.75 90 top
R153  2.2k  [0603]  122.94,121.67 270 top
R154  1k  [0603]  129.29,106.43 0 top
R155  2.2k  [0603]  129.92,142.62 0 top
R156  10k  [0603]  105.79,160.27 180 top
R157  10  [0603]  143.26,160.4 90 top
R158  100k  [0603]  141.54,146.69 270 top
R159  200k  [0603]  138.43,154.05 270 top
R160  1k  [0603]  130.81,148.97 90 top
R161  1k  [0603]  133.1,148.97 90 top
R162  2.2k  [0603]  132.46,174.12 90 top
R163  2.2k  [0603]  135.13,175.64 180 top
R164  0  [0603]  113.16,154.3 0 top
R165  1k  [0603]  99.44,149.35 180 top
R166  100  [0603]  92.46,150.88 180 top
R167  1k  [0603]  99.44,152.15 180 top
R168  470  [0603]  92.46,152.78 180 top
R169  0  [0603]  125.48,154.18 180 top
R170  0  [0603]  122.17,154.18 0 top
R171  100k  [0603]  91.19,167.39 0 top
R172  100k  [0603]  91.19,169.93 0 top
R173  100k  [0603]  129.92,136.91 180 top
R174  100k  [0603]  130.56,116.59 0 top
R175  100k  [0603]  99.44,156.59 180 top
R176  100k  [0603]  129.67,146.05 180 top
R177  100k  [0603]  111.89,147.57 0 top
R178  100k  [0603]  111.89,149.1 180 top
R179  100k  [0603]  120.27,121.67 270 top
R180  1k  [0603]  99.44,154.94 180 top
R181  1k  [0603]  92.46,154.69 180 top
R182  100k  [0603]  99.44,158.24 0 top
R183  1k  [0603]  137.92,148.97 270 top
R184  100k  [0603]  144.15,148.97 0 top
S1  RESET  [TACTILE_SWITCH_SMD_5.2MM]  10.67,42.42 90 top
S2  BOOT  [TACTILE_SWITCH_SMD_5.2MM]  17.02,42.42 90 top
S3  SARA_PWR  [TACTILE_SWITCH_SMD_5.2MM]  23.37,42.42 270 top
S4  RESET  [TACTILE_SWITCH_SMD_5.2MM]  87.38,42.42 90 top
S5  BOOT  [TACTILE_SWITCH_SMD_5.2MM]  93.73,42.42 90 top
S6  SARA_PWR  [TACTILE_SWITCH_SMD_5.2MM]  100.08,42.42 270 top
S7  RESET  [TACTILE_SWITCH_SMD_5.2MM]  10.67,128.02 90 top
S8  BOOT  [TACTILE_SWITCH_SMD_5.2MM]  17.02,128.02 90 top
S9  SARA_PWR  [TACTILE_SWITCH_SMD_5.2MM]  23.37,128.02 270 top
S10  RESET  [TACTILE_SWITCH_SMD_5.2MM]  87.38,128.02 90 top
S11  BOOT  [TACTILE_SWITCH_SMD_5.2MM]  93.73,128.02 90 top
S12  SARA_PWR  [TACTILE_SWITCH_SMD_5.2MM]  100.08,128.02 270 top
TP1  TEST-POINT3  [PAD.03X.03]  48.77,66.55 0 bottom
TP2  TEST-POINT3  [PAD.03X.03]  47.5,66.55 0 bottom
TP3  TEST-POINT3  [PAD.03X.03]  46.23,66.55 0 bottom
TP4  TEST-POINT3  [PAD.03X.03]  44.96,66.55 0 bottom
TP5  TEST-POINT3  [PAD.03X.03]  48.77,57.66 0 bottom
TP6  TEST-POINT3  [PAD.03X.03]  47.5,57.66 0 bottom
TP7  TEST-POINT3  [PAD.03X.03]  46.23,57.66 0 bottom
TP8  TEST-POINT3  [PAD.03X.03]  44.96,57.66 0 bottom
TP9  TEST-POINT3  [PAD.03X.03]  60.2,72.9 0 bottom
TP10  TEST-POINT3  [PAD.03X.03]  62.74,72.9 0 bottom
TP11  TEST-POINT3  [PAD.03X.03]  125.48,66.55 0 bottom
TP12  TEST-POINT3  [PAD.03X.03]  58.93,88.14 0 bottom
TP13  TEST-POINT3  [PAD.03X.03]  19.56,56.39 0 bottom
TP14  TEST-POINT3  [PAD.03X.03]  42.42,66.55 0 bottom
TP15  TEST-POINT3  [PAD.03X.03]  41.15,66.55 0 bottom
TP16  TEST-POINT3  [PAD.03X.03]  39.88,66.55 0 bottom
TP17  TEST-POINT3  [PAD.03X.03]  38.61,66.55 0 bottom
TP18  TEST-POINT3  [PAD.03X.03]  42.42,60.2 0 bottom
TP19  TEST-POINT3  [PAD.03X.03]  41.15,60.2 0 bottom
TP20  TEST-POINT3  [PAD.03X.03]  39.88,60.2 0 bottom
TP21  TEST-POINT3  [PAD.03X.03]  38.61,60.2 0 bottom
TP22  TEST-POINT3  [PAD.03X.03]  64.01,75.44 0 bottom
TP23  TEST-POINT3  [PAD.03X.03]  62.74,25.91 0 bottom
TP24  TEST-POINT3  [PAD.03X.03]  32.26,18.29 0 bottom
TP25  TEST-POINT3  [PAD.03X.03]  124.21,66.55 0 bottom
TP26  TEST-POINT3  [PAD.03X.03]  122.94,66.55 0 bottom
TP27  TEST-POINT3  [PAD.03X.03]  121.67,66.55 0 bottom
TP28  TEST-POINT3  [PAD.03X.03]  125.48,57.66 0 bottom
TP29  TEST-POINT3  [PAD.03X.03]  124.21,57.66 0 bottom
TP30  TEST-POINT3  [PAD.03X.03]  122.94,57.66 0 bottom
TP31  TEST-POINT3  [PAD.03X.03]  121.67,57.66 0 bottom
TP32  TEST-POINT3  [PAD.03X.03]  136.91,72.9 0 bottom
TP33  TEST-POINT3  [PAD.03X.03]  139.45,72.9 0 bottom
TP34  TEST-POINT3  [PAD.03X.03]  135.64,88.14 0 bottom
TP35  TEST-POINT3  [PAD.03X.03]  119.13,66.55 0 bottom
TP36  TEST-POINT3  [PAD.03X.03]  117.86,66.55 0 bottom
TP37  TEST-POINT3  [PAD.03X.03]  116.59,66.55 0 bottom
TP38  TEST-POINT3  [PAD.03X.03]  115.32,66.55 0 bottom
TP39  TEST-POINT3  [PAD.03X.03]  119.13,60.2 0 bottom
TP40  TEST-POINT3  [PAD.03X.03]  117.86,60.2 0 bottom
TP41  TEST-POINT3  [PAD.03X.03]  116.59,60.2 0 bottom
TP42  TEST-POINT3  [PAD.03X.03]  115.32,60.2 0 bottom
TP43  TEST-POINT3  [PAD.03X.03]  96.27,56.39 0 bottom
TP44  TEST-POINT3  [PAD.03X.03]  140.72,75.44 0 bottom
TP45  TEST-POINT3  [PAD.03X.03]  139.45,25.91 0 bottom
TP46  TEST-POINT3  [PAD.03X.03]  108.97,18.29 0 bottom
TP47  TEST-POINT3  [PAD.03X.03]  48.77,152.15 0 bottom
TP48  TEST-POINT3  [PAD.03X.03]  47.5,152.15 0 bottom
TP49  TEST-POINT3  [PAD.03X.03]  46.23,152.15 0 bottom
TP50  TEST-POINT3  [PAD.03X.03]  44.96,152.15 0 bottom
TP51  TEST-POINT3  [PAD.03X.03]  48.77,143.26 0 bottom
TP52  TEST-POINT3  [PAD.03X.03]  47.5,143.26 0 bottom
TP53  TEST-POINT3  [PAD.03X.03]  46.23,143.26 0 bottom
TP54  TEST-POINT3  [PAD.03X.03]  44.96,143.26 0 bottom
TP55  TEST-POINT3  [PAD.03X.03]  60.2,158.5 0 bottom
TP56  TEST-POINT3  [PAD.03X.03]  62.74,158.5 0 bottom
TP57  TEST-POINT3  [PAD.03X.03]  58.93,173.74 0 bottom
TP58  TEST-POINT3  [PAD.03X.03]  42.42,152.15 0 bottom
TP59  TEST-POINT3  [PAD.03X.03]  41.15,152.15 0 bottom
TP60  TEST-POINT3  [PAD.03X.03]  39.88,152.15 0 bottom
TP61  TEST-POINT3  [PAD.03X.03]  38.61,152.15 0 bottom
TP62  TEST-POINT3  [PAD.03X.03]  42.42,145.8 0 bottom
TP63  TEST-POINT3  [PAD.03X.03]  41.15,145.8 0 bottom
TP64  TEST-POINT3  [PAD.03X.03]  39.88,145.8 0 bottom
TP65  TEST-POINT3  [PAD.03X.03]  38.61,145.8 0 bottom
TP66  TEST-POINT3  [PAD.03X.03]  19.56,141.99 0 bottom
TP67  TEST-POINT3  [PAD.03X.03]  64.01,161.04 0 bottom
TP68  TEST-POINT3  [PAD.03X.03]  62.74,111.51 0 bottom
TP69  TEST-POINT3  [PAD.03X.03]  32.26,103.89 0 bottom
TP70  TEST-POINT3  [PAD.03X.03]  125.48,152.15 0 bottom
TP71  TEST-POINT3  [PAD.03X.03]  124.21,152.15 0 bottom
TP72  TEST-POINT3  [PAD.03X.03]  122.94,152.15 0 bottom
TP73  TEST-POINT3  [PAD.03X.03]  121.67,152.15 0 bottom
TP74  TEST-POINT3  [PAD.03X.03]  125.48,143.26 0 bottom
TP75  TEST-POINT3  [PAD.03X.03]  124.21,143.26 0 bottom
TP76  TEST-POINT3  [PAD.03X.03]  122.94,143.26 0 bottom
TP77  TEST-POINT3  [PAD.03X.03]  121.67,143.26 0 bottom
TP78  TEST-POINT3  [PAD.03X.03]  136.91,158.5 0 bottom
TP79  TEST-POINT3  [PAD.03X.03]  139.45,158.5 0 bottom
TP80  TEST-POINT3  [PAD.03X.03]  135.64,173.74 0 bottom
TP81  TEST-POINT3  [PAD.03X.03]  119.13,152.15 0 bottom
TP82  TEST-POINT3  [PAD.03X.03]  117.86,152.15 0 bottom
TP83  TEST-POINT3  [PAD.03X.03]  116.59,152.15 0 bottom
TP84  TEST-POINT3  [PAD.03X.03]  115.32,152.15 0 bottom
TP85  TEST-POINT3  [PAD.03X.03]  119.13,145.8 0 bottom
TP86  TEST-POINT3  [PAD.03X.03]  117.86,145.8 0 bottom
TP87  TEST-POINT3  [PAD.03X.03]  116.59,145.8 0 bottom
TP88  TEST-POINT3  [PAD.03X.03]  115.32,145.8 0 bottom
TP89  TEST-POINT3  [PAD.03X.03]  96.27,141.99 0 bottom
TP90  TEST-POINT3  [PAD.03X.03]  140.72,161.04 0 bottom
TP91  TEST-POINT3  [PAD.03X.03]  139.45,111.51 0 bottom
TP92  TEST-POINT3  [PAD.03X.03]  108.97,103.89 0 bottom
U1  SARA-R5  [SARA-LGA]  44.96,77.98 0 top
U2  MCP73831  [SOT23-5]  44.96,32.26 270 top
U3  3.3V  [SOT23-5]  67.44,66.42 0 top
U4  MAX17048  [DFN-8]  40.77,29.59 90 top
U5  AP7361C-33FGE  [UDFN-8]  25.91,25.91 90 top
U6  AP7361C-33FGE  [UDFN-8]  102.62,25.91 90 top
U7  PCA9306  [VSSOP_8PIN]  61.47,72.9 270 top
U8  74HC1G04  [SOT353]  58.67,63.37 180 top
U9  SARA-R5  [SARA-LGA]  121.67,77.98 0 top
U10  9DoF IMU  [QFN24-3X3-ICM-20948]  121.67,53.85 180 top
U11  1.8V/100mA  [SC70]  129.92,53.85 0 top
U12  MCP73831  [SOT23-5]  121.67,32.26 270 top
U13  9DoF IMU  [QFN24-3X3-ICM-20948]  44.96,53.85 180 top
U14  1.8V/100mA  [SC70]  53.21,53.85 0 top
U15  3.3V  [SOT23-5]  144.15,66.42 0 top
U16  PCA9306  [VSSOP_8PIN]  138.18,72.9 270 top
U17  74HC1G04  [SOT353]  135.38,63.37 180 top
U18  MAX17048  [DFN-8]  117.48,29.59 90 top
U19  AP7361C-33FGE  [UDFN-8]  25.91,111.51 90 top
U20  SARA-R5  [SARA-LGA]  44.96,163.58 0 top
U21  9DoF IMU  [QFN24-3X3-ICM-20948]  44.96,139.45 180 top
U22  1.8V/100mA  [SC70]  53.21,139.45 0 top
U23  MCP73831  [SOT23-5]  44.96,117.86 270 top
U24  3.3V  [SOT23-5]  67.44,152.02 0 top
U25  PCA9306  [VSSOP_8PIN]  61.47,158.5 270 top
U26  74HC1G04  [SOT353]  58.67,148.97 180 top
U27  MAX17048  [DFN-8]  40.77,115.19 90 top
U28  AP7361C-33FGE  [UDFN-8]  102.62,111.51 90 top
U29  SARA-R5  [SARA-LGA]  121.67,163.58 0 top
U30  9DoF IMU  [QFN24-3X3-ICM-20948]  121.67,139.45 180 top
U31  1.8V/100mA  [SC70]  129.92,139.45 0 top